# Altium PCB VESC_BMS.PcbDoc (part 1 of 4)
Units mm, origin at the board's own origin, x right, y up, seen from the top; angles counter-clockwise.
Board outline 100 x 75 mm, 4 copper layers (L1, L2, L3, L4), stack 1.446 mm thick; 263 components, 195 nets, 808 pads, 1031 vias.
Unrouted connection lines stored in the file: 1.
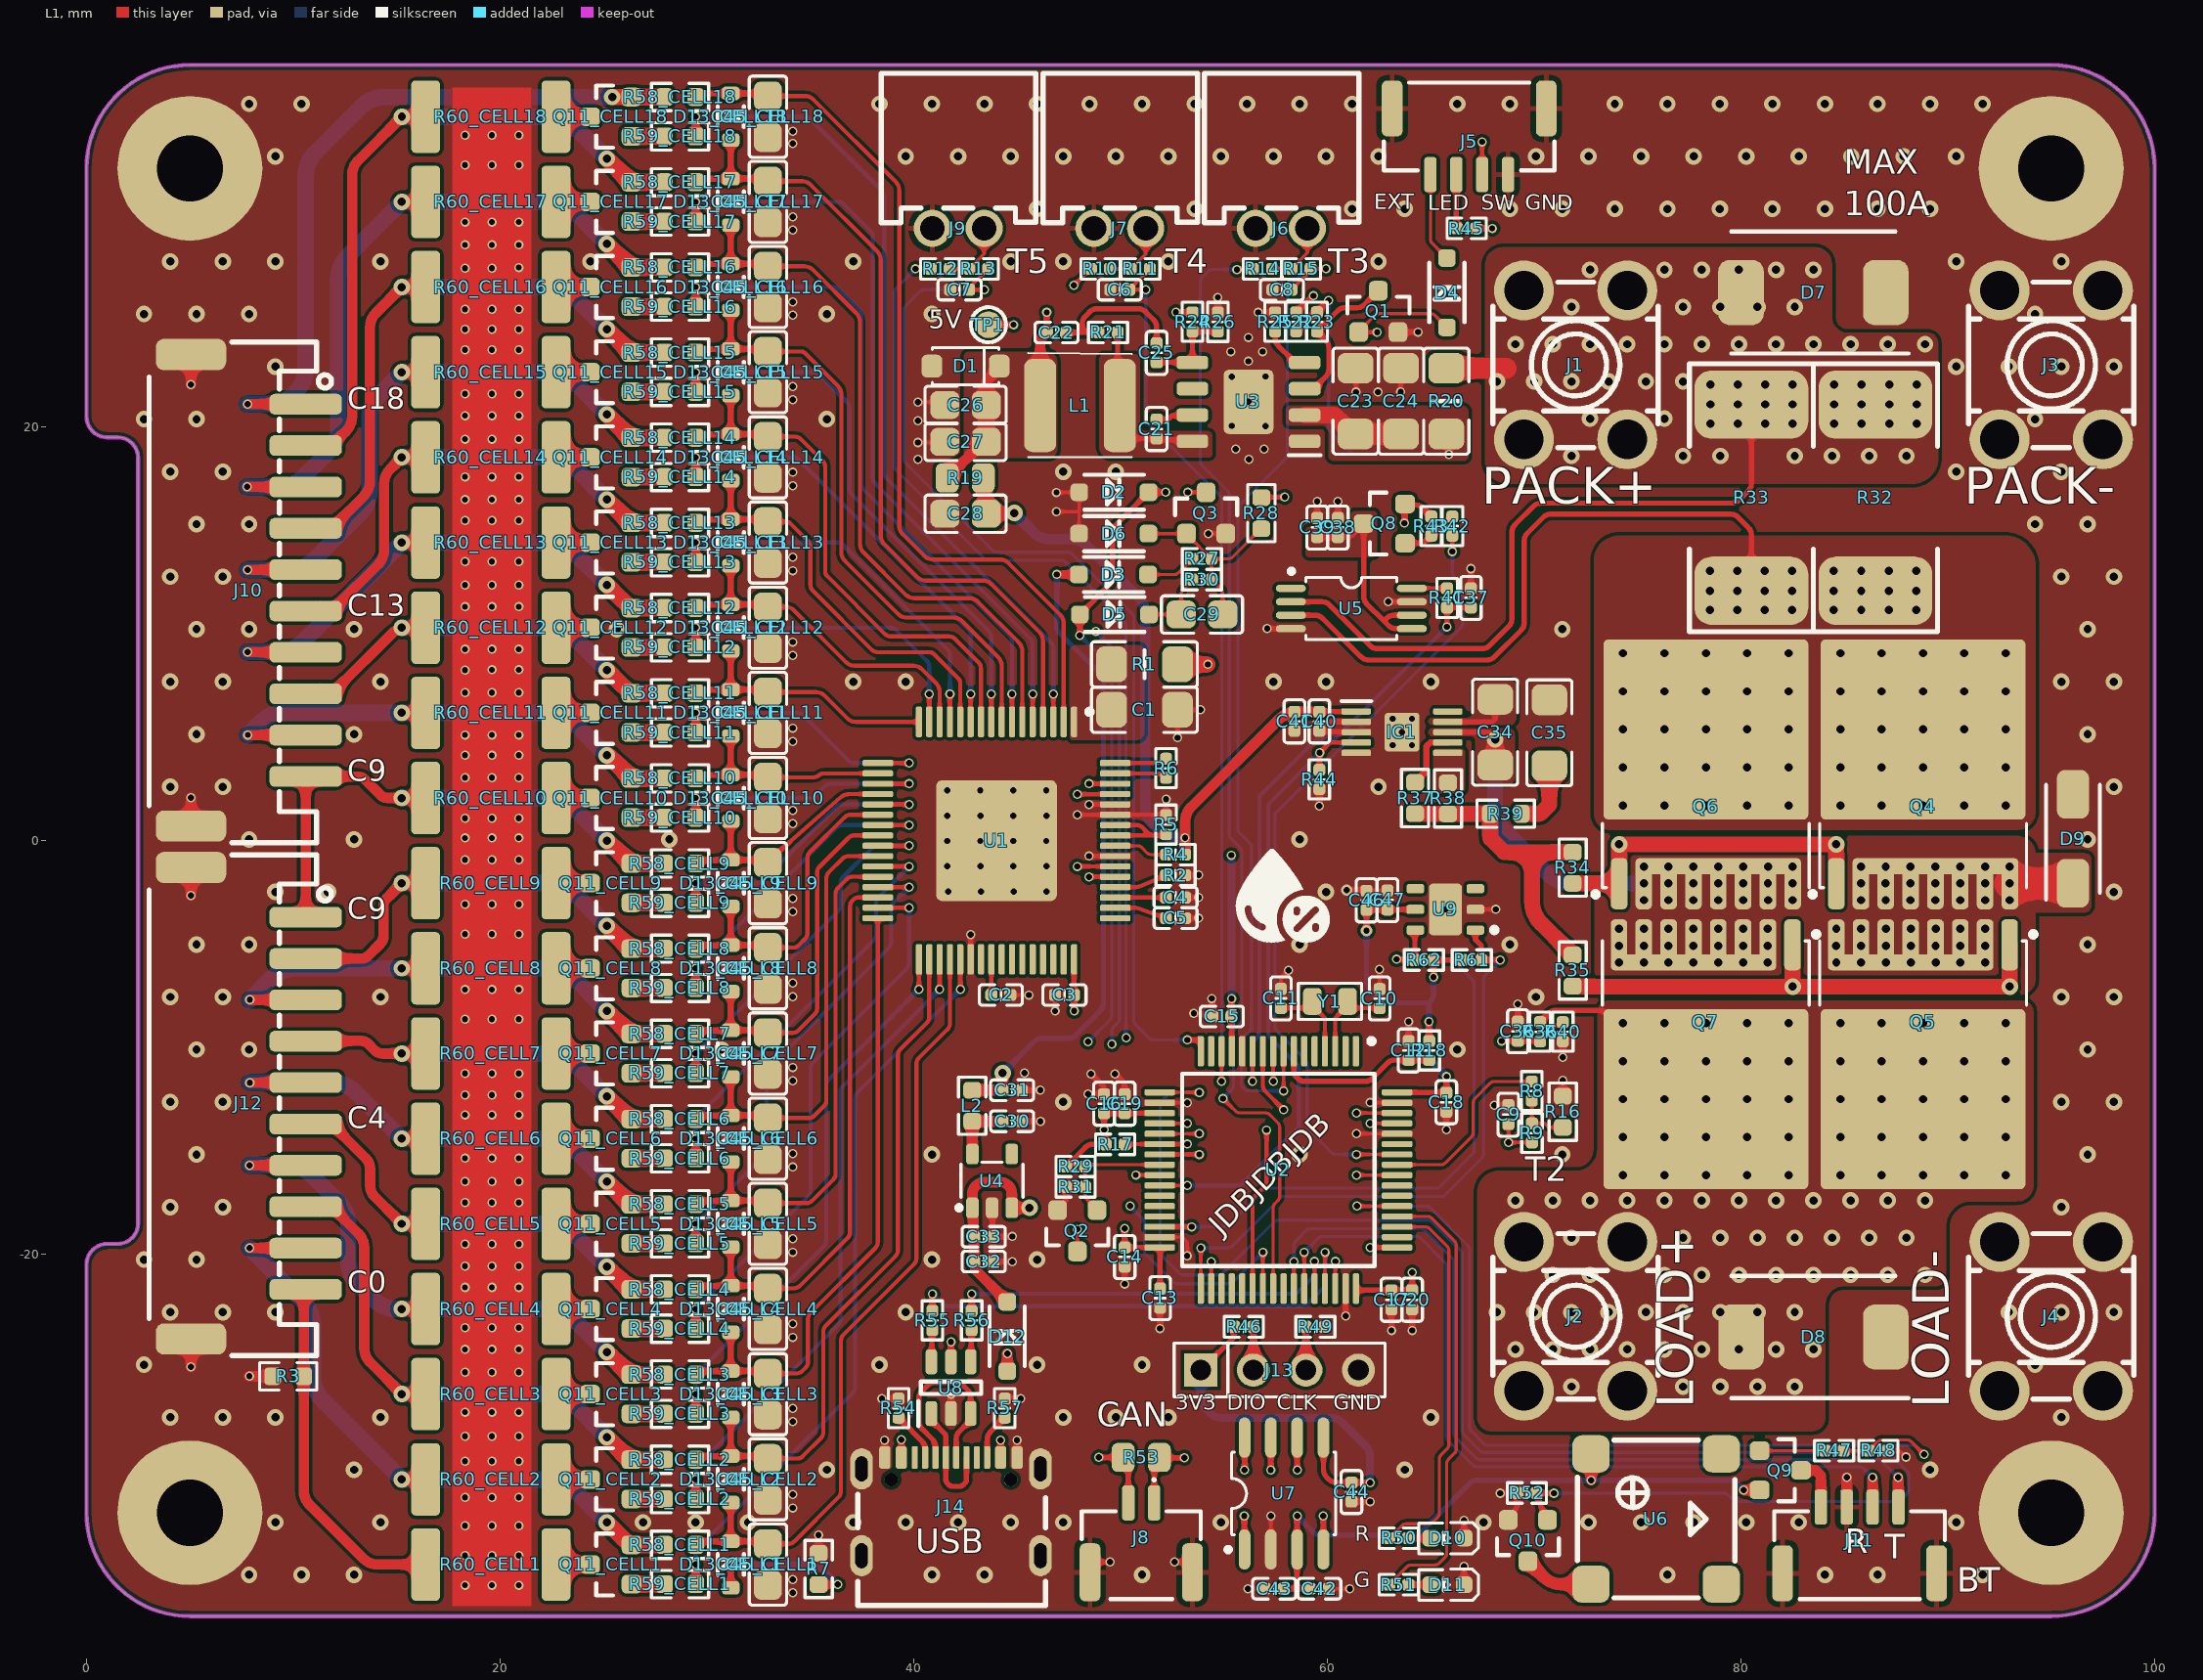
[diagram p0: L1 view]
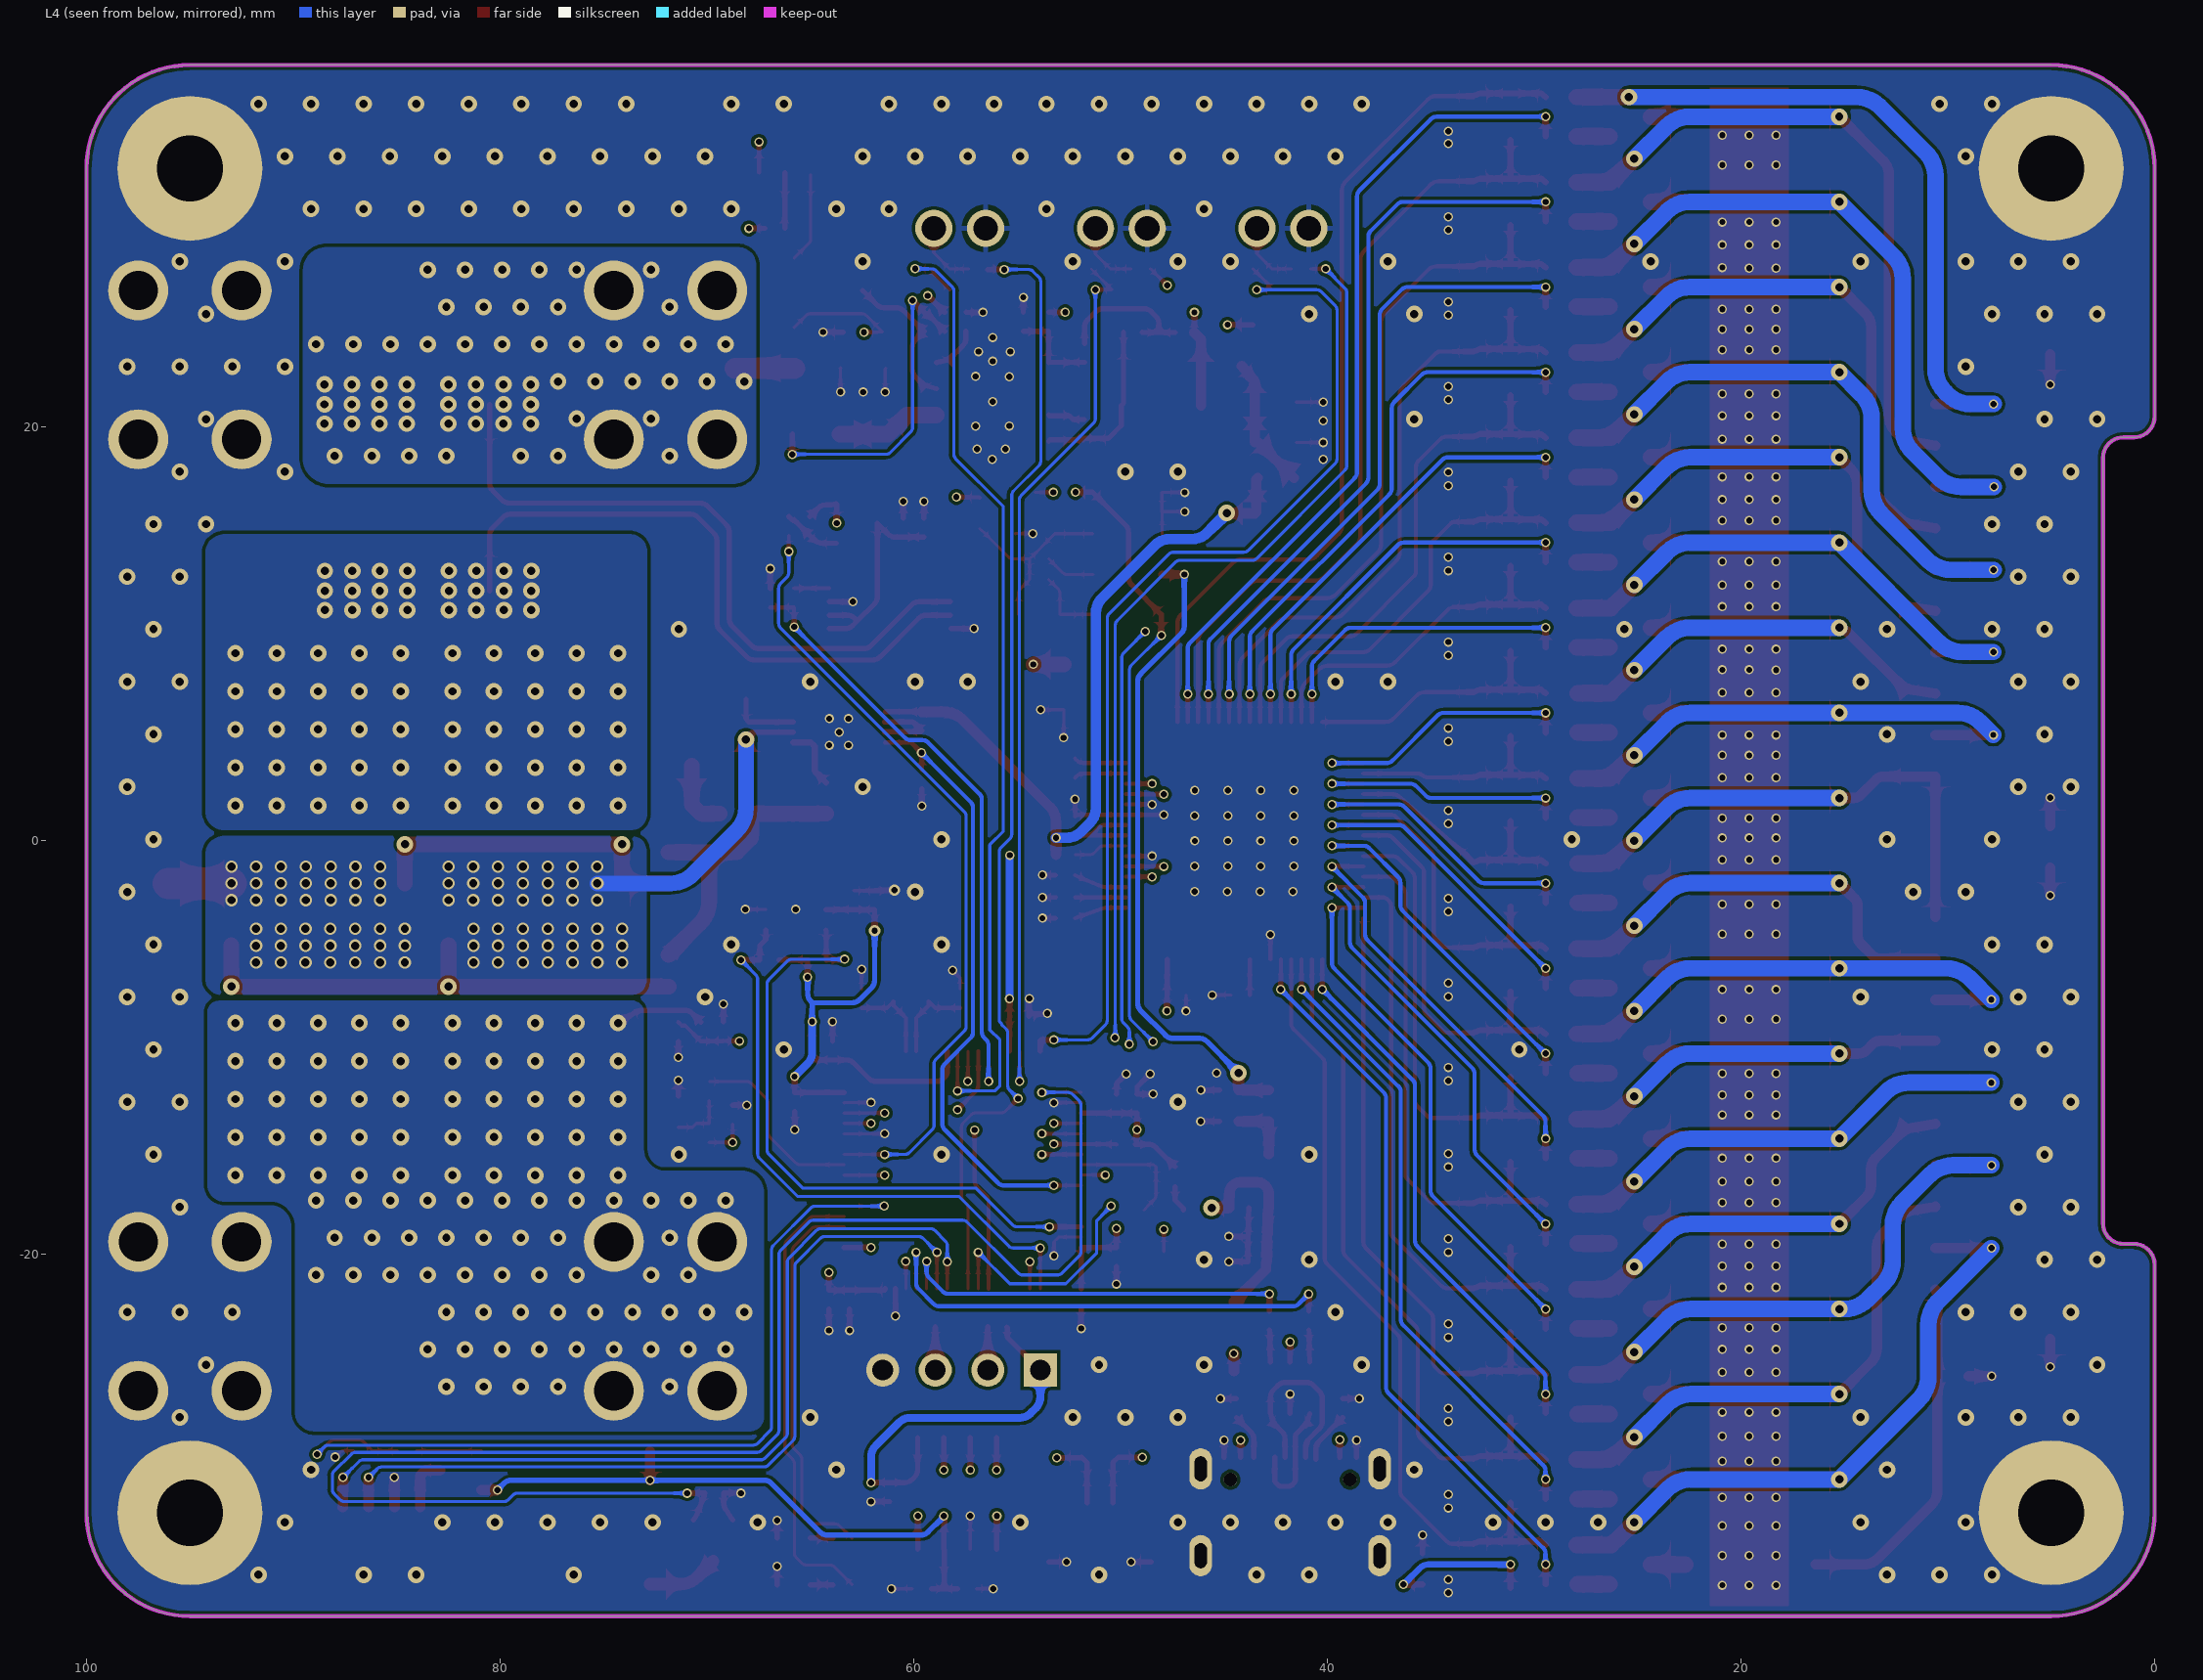
[diagram p1: L4 view, seen from below]
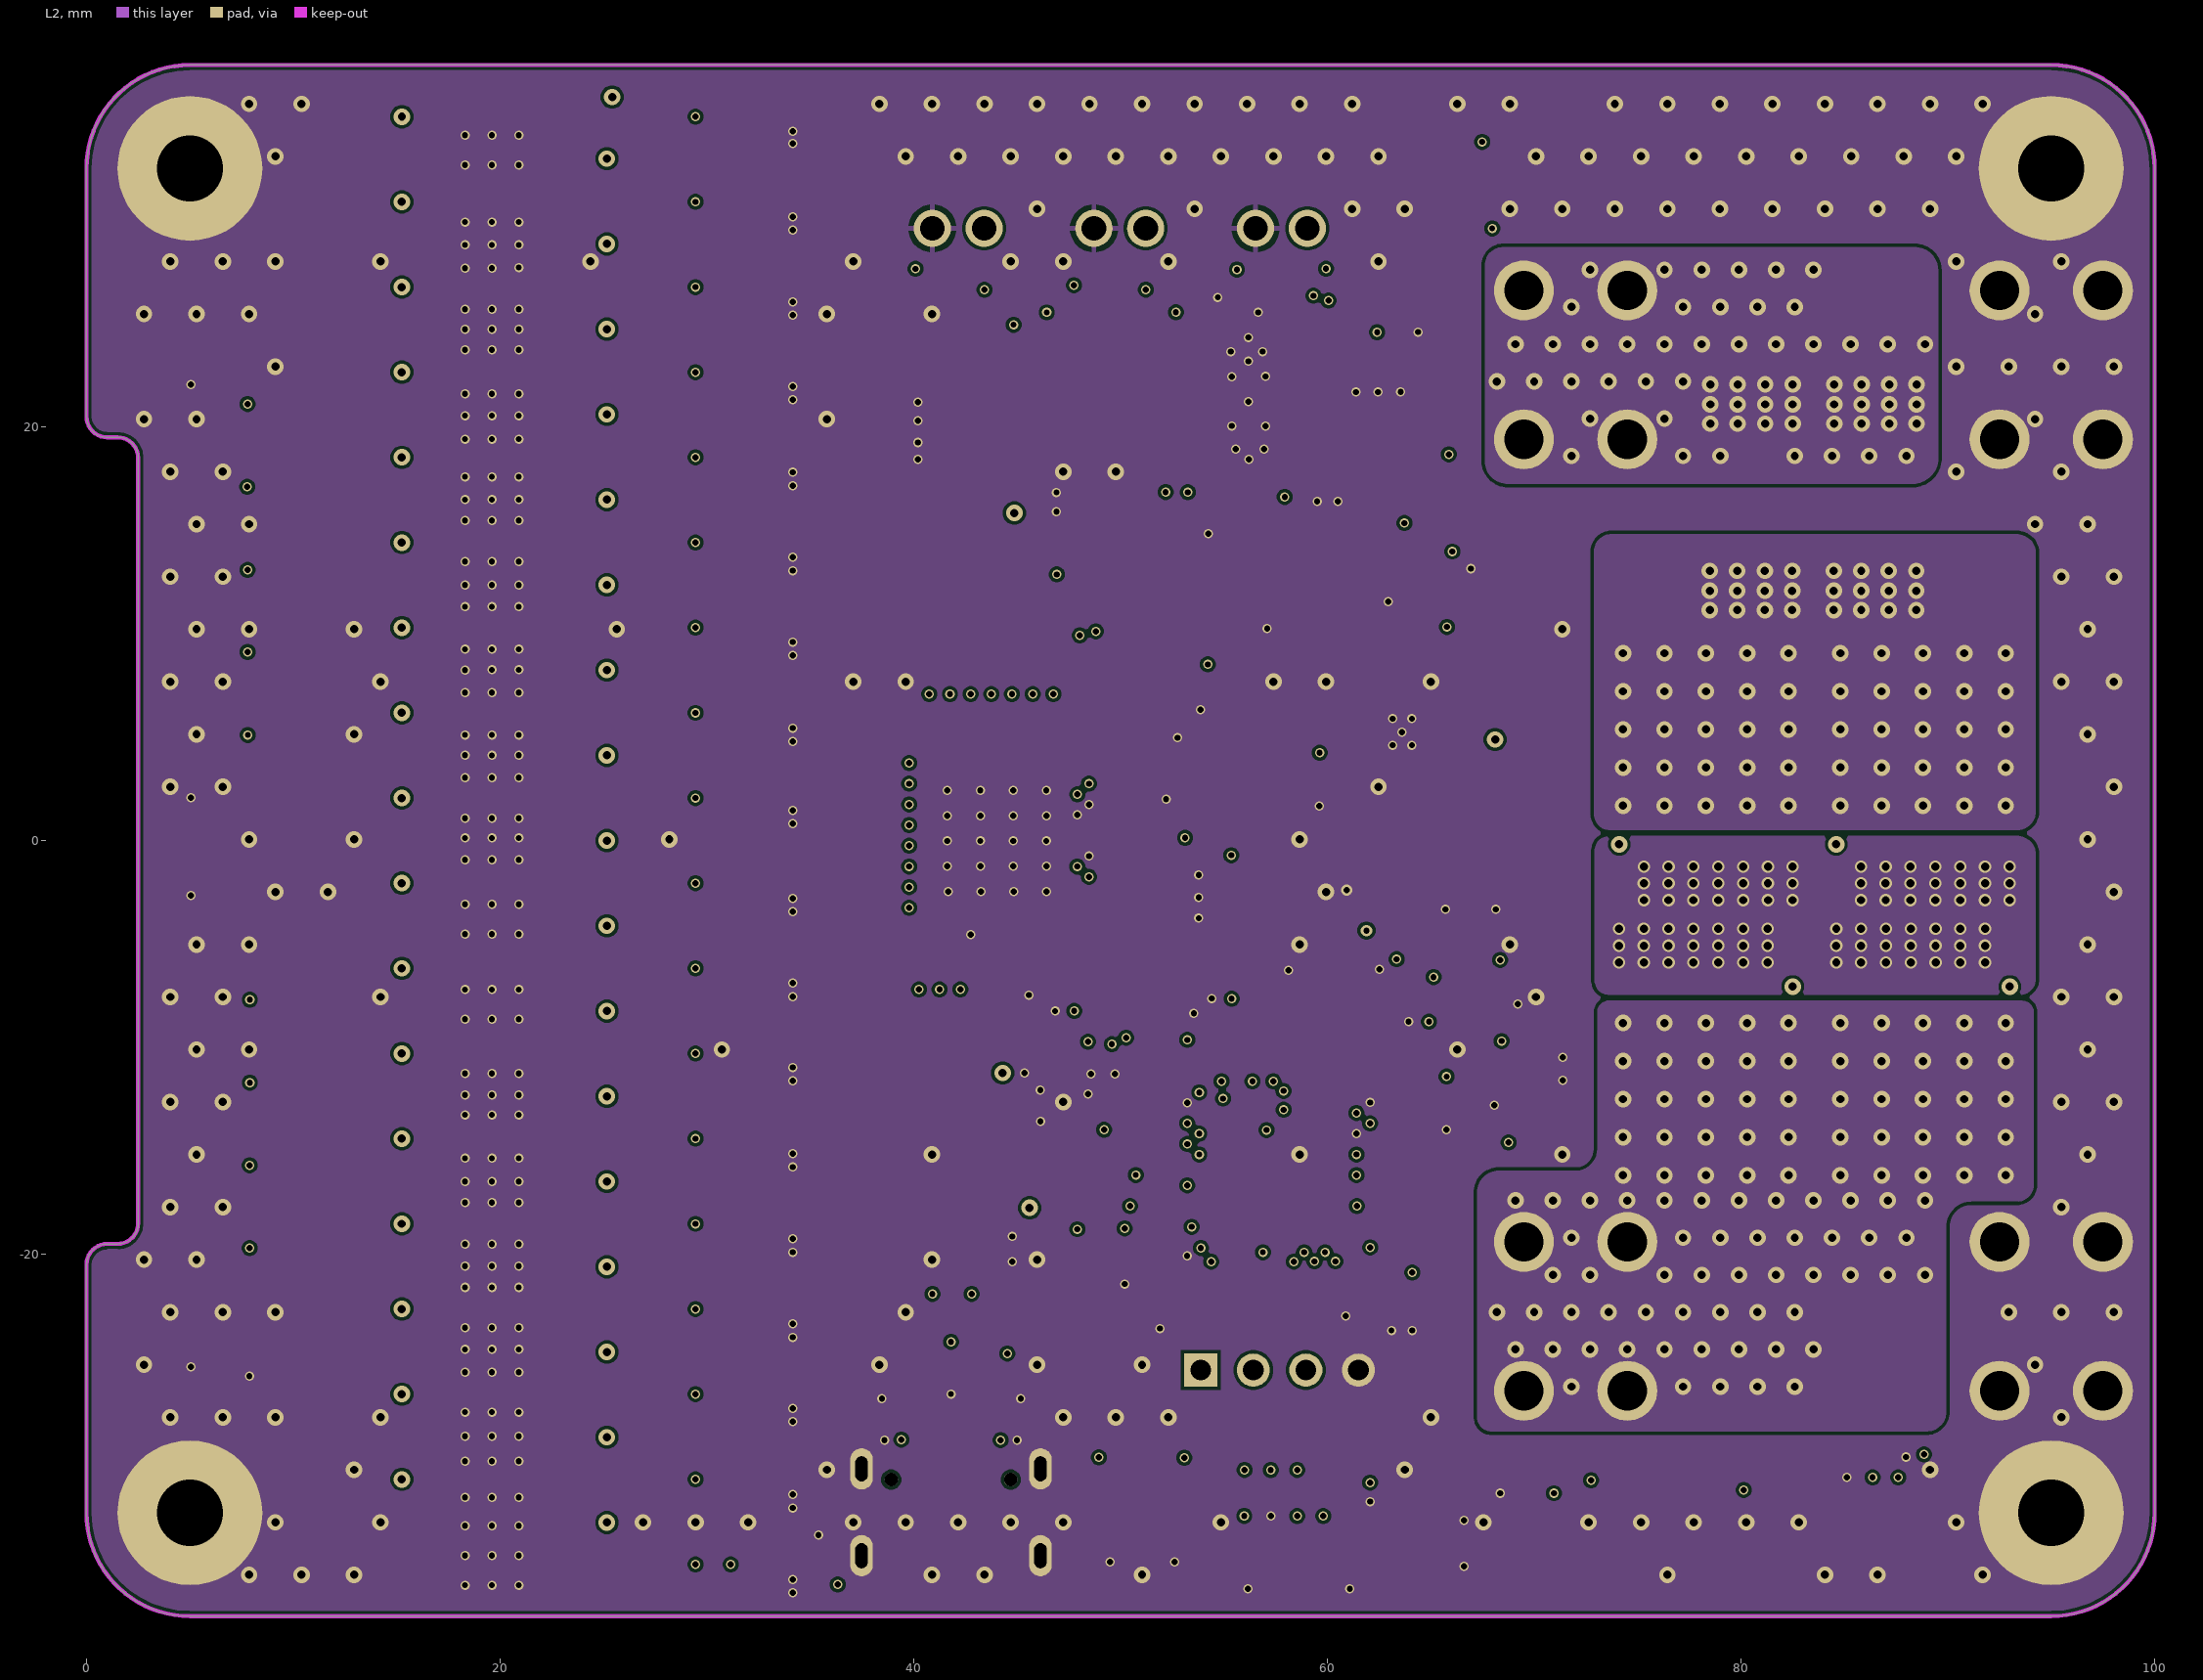
[diagram p2: L2]
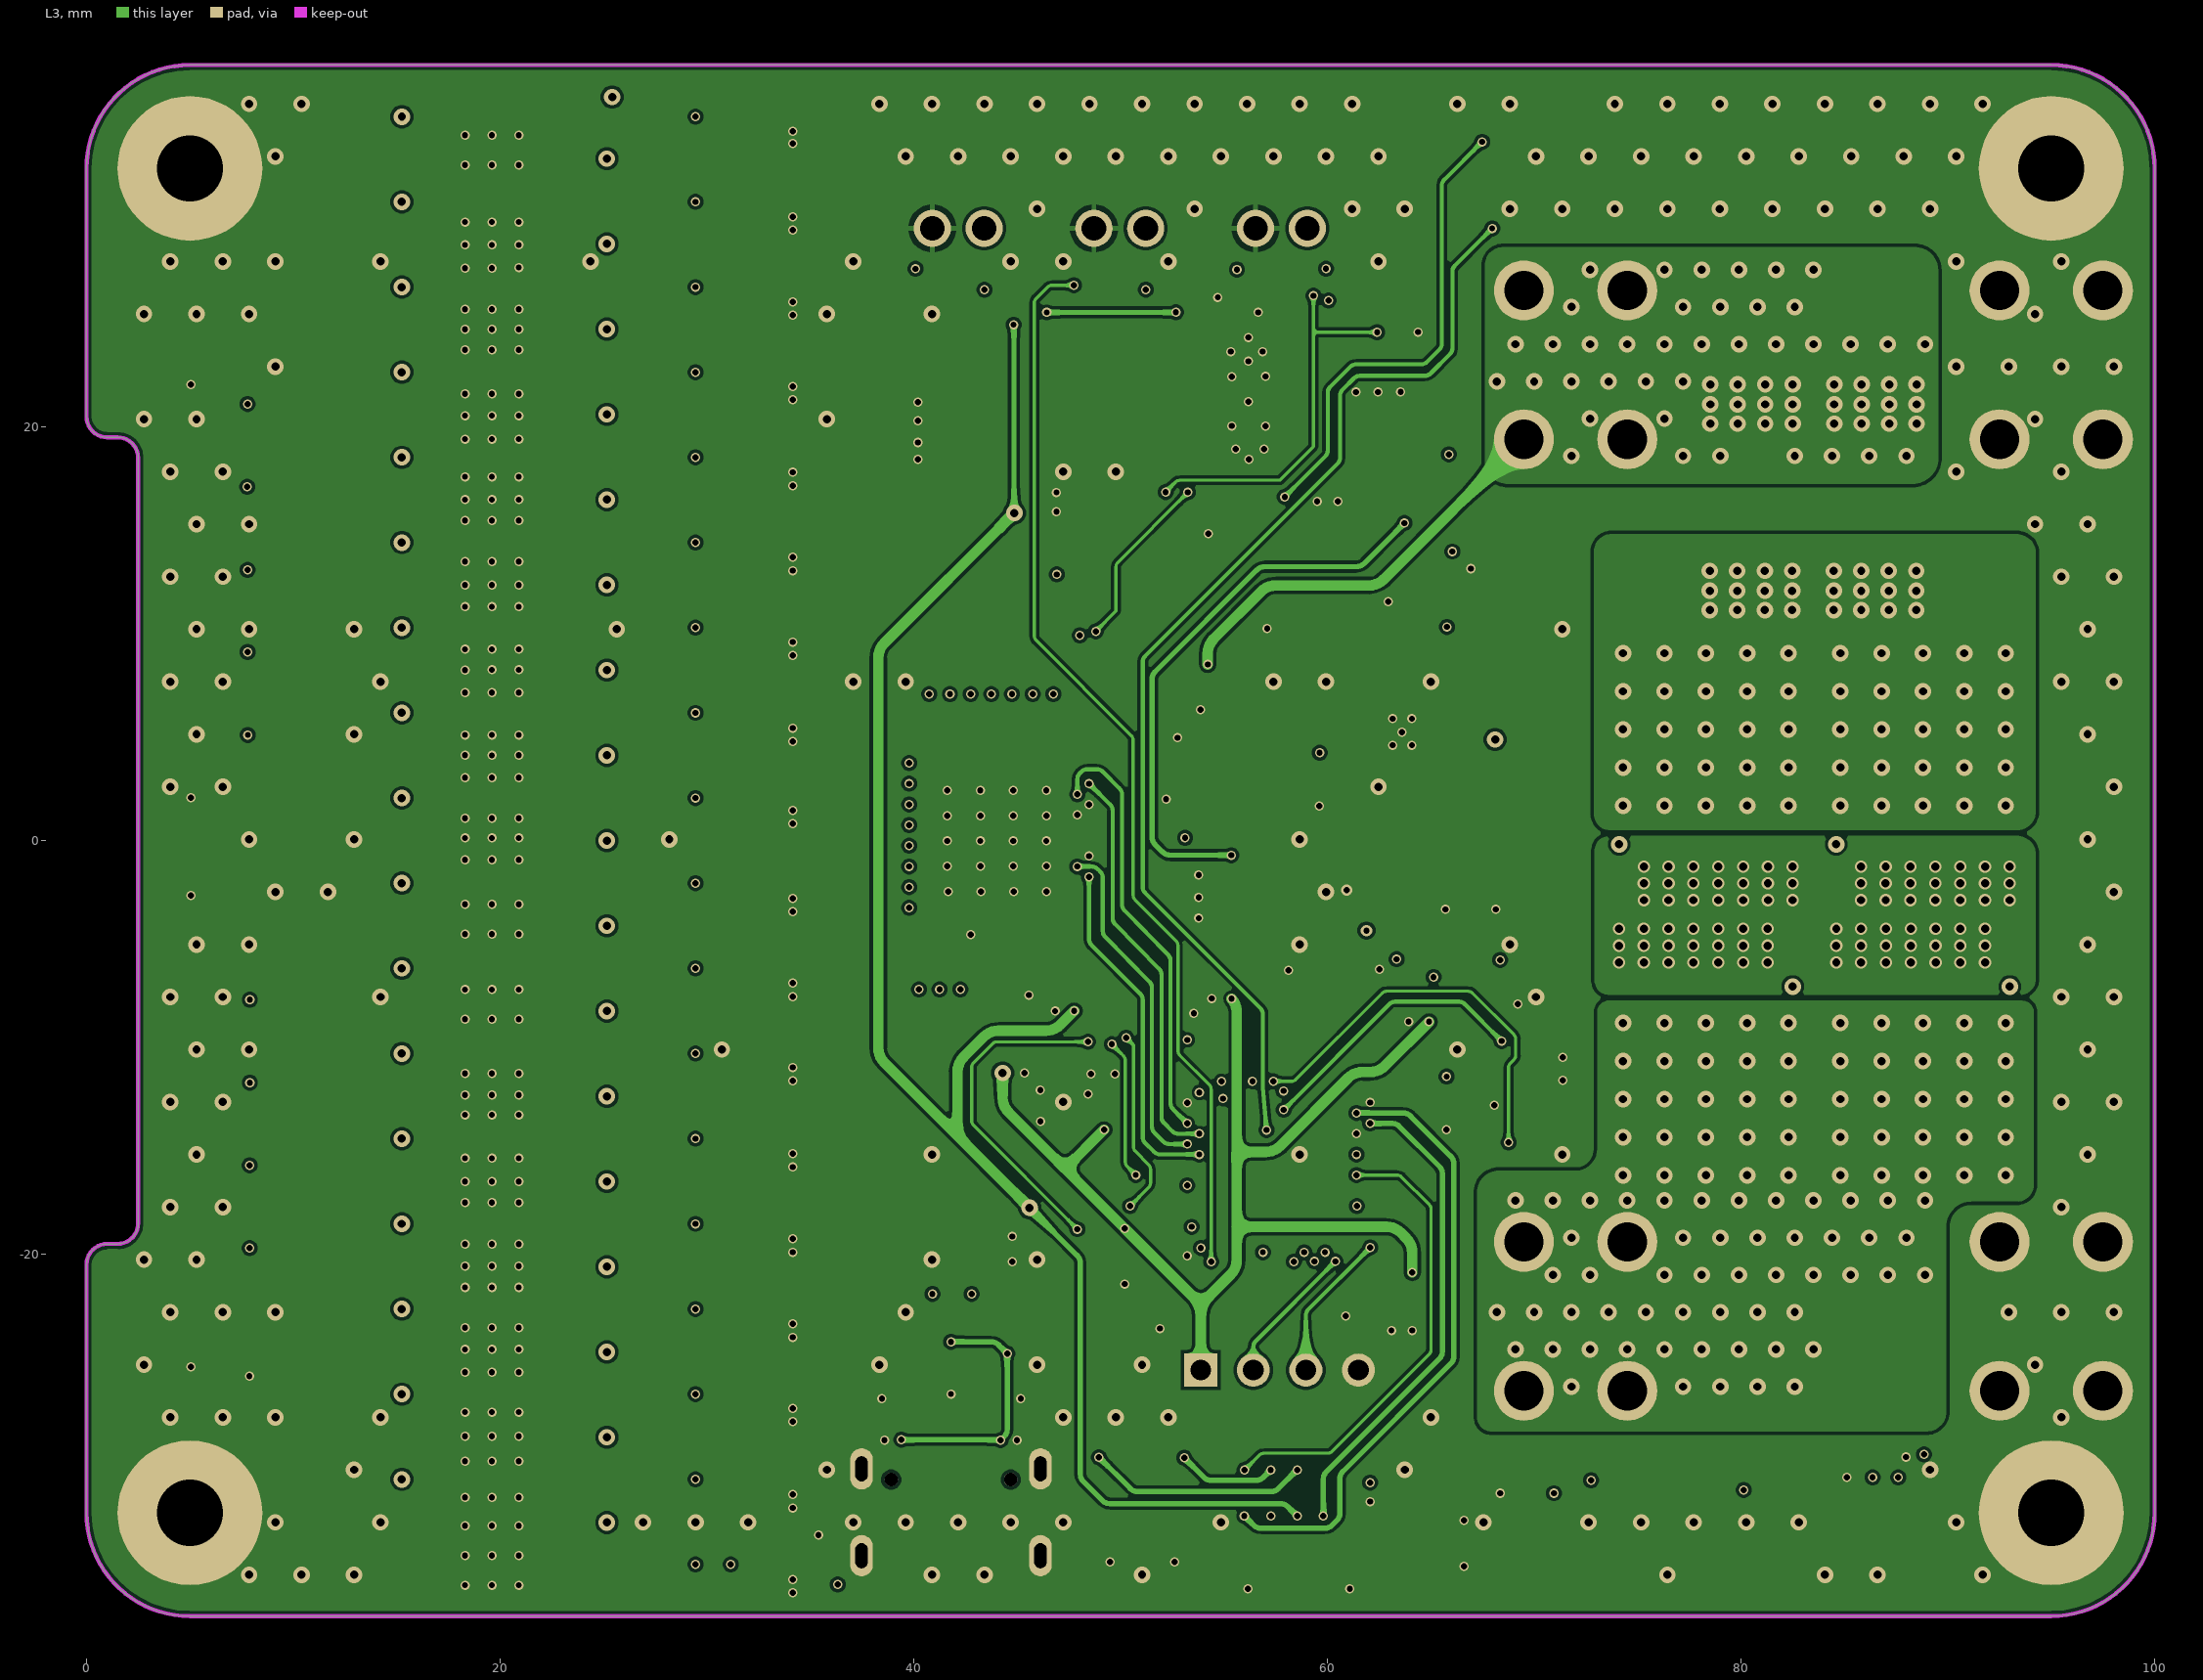
[diagram p3: L3]
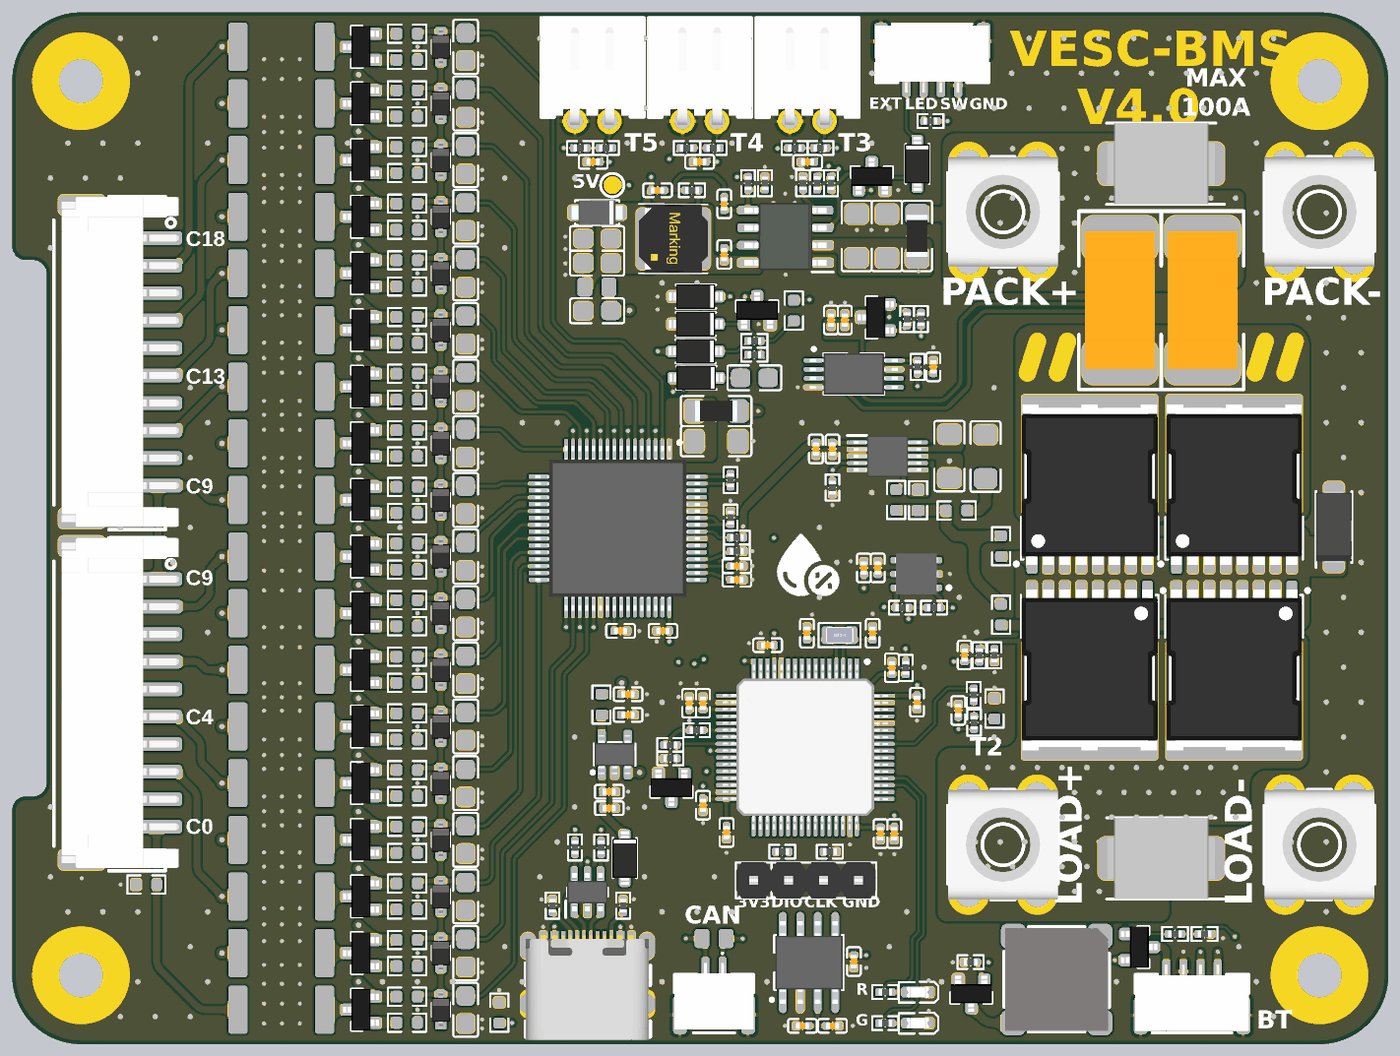
[diagram p6: 3D render of the assembled board from above, using the file's embedded part models]

## Layer stack, top to bottom
Top Solder: solder mask 0.05, Solder Resist, Dk 3.5
L1: signal copper 0.035
Dielectric 1: prepreg 0.288, FR-4, Dk 4.2
L2: signal copper 0.035
Dielectric 3: core 0.73, Dk 4.2
L3: signal copper 0.035
Dielectric 2: prepreg 0.288, Dk 4.2
L4: signal copper 0.035
Bottom Solder: solder mask 0.05, Solder Resist, Dk 3.5

## Board outline
0,-32.5 0,-20.5 cw(c1,-20.5) 1,-19.5 1.5,-19.5 ccw(c1.5,-18.5) 2.5,-18.5 2.5,18.5 ccw(c1.5,18.5) 1.5,19.5 1,19.5 cw(c1,20.5) 0,20.5 0,32.5 cw(c5,32.5) 5,37.5 95,37.5 cw(c95,32.5) 100,32.5 100,-32.5 cw(c95,-32.5) 95,-37.5 5,-37.5 cw(c5,-32.5)

## Design rules (kind name [scope] priority, off if disabled: settings)
Clearance [All] p1: gap=0.152 ignorepadtopadclearanceinfootprint=FALSE
ComponentClearance [All] p1 off: gap=0.254 collisioncheckmode=3 verticalgap=0.254 showdistances=FALSE
HoleSize [All] p1: absolutevalues=TRUE maxlimit=10 minlimit=0.2 maxpercent=80.000 minpercent=20.000
HoleToHoleClearance [All] p1: gap=0.3 allowstackedmicrovias=TRUE
MinimumSolderMaskSliver [All] p1 off: minsoldermaskwidth=0.254
PolygonConnect PolygonConnect_IC [HasFootprint('SSOP44') OR HasFootprint('LQFP48') OR HasFootprint('SO-8') OR HasFootprint('MSOP10') OR HasFootprint('TSSOP16') OR HasFootprint('PDSO8') OR HasFootprint('QFN24') OR HasFootprint('USB3075 - NOSLOT') OR HasFootprint('FSOP4')] p1: connectstyle=Relief reliefconductorwidth=0.254 reliefentries=4 polygonreliefangle="90 Angle" airgapwidth=0.2
PolygonConnect [All] p2: connectstyle=Direct reliefconductorwidth=0.254 reliefentries=4 polygonreliefangle="90 Angle" airgapwidth=0.254
RoutingVias [All] p1: holewidth=0.25 width=0.45 viastyle="Through Hole" minholewidth=0.25 minwidth=0.45 maxholewidth=8 maxwidth=10
SilkToSilkClearance [All] p1 off: silktosilkclearance=0.254
SilkToSolderMaskClearance [IsPad] p1 off: minsilkscreentomaskgap=0.127 clearancetoexposedcopper=TRUE
SolderMaskExpansion [All] p1: expansion=0.05 istentingtop=FALSE
SupplyNets "Schematic Supply Nets" [InNet('VBUS')] p1: voltage=0.000
SupplyNets "Schematic Supply Nets_4" [InNet('5V')] p2: voltage=0.000
SupplyNets "Schematic Supply Nets_3" [InNet('GND')] p3: voltage=0.000
SupplyNets "Schematic Supply Nets_1" [InNet('3V3')] p4: voltage=0.000
Width [All] p1: maxlimit=20 minlimit=0.15 preferedwidth=0.152
24 further rules are at their usual default settings.

## Classes and differential pairs
component class "Humidity Sensor": C46 C47 R61 R62 U9
channel class BMS_CellNode: CELL1 CELL2 CELL3 CELL4 CELL5 CELL6 CELL7 CELL8 CELL9 CELL10 CELL11 CELL12 CELL13 CELL14 CELL15 CELL16 CELL17 CELL18
component class CELL18: C45_CELL18 D13_CELL18 Q11_CELL18 R58_CELL18 R59_CELL18 R60_CELL18
component class CELL17: C45_CELL17 D13_CELL17 Q11_CELL17 R58_CELL17 R59_CELL17 R60_CELL17
component class CELL16: C45_CELL16 D13_CELL16 Q11_CELL16 R58_CELL16 R59_CELL16 R60_CELL16
component class CELL15: C45_CELL15 D13_CELL15 Q11_CELL15 R58_CELL15 R59_CELL15 R60_CELL15
component class CELL14: C45_CELL14 D13_CELL14 Q11_CELL14 R58_CELL14 R59_CELL14 R60_CELL14
component class CELL13: C45_CELL13 D13_CELL13 Q11_CELL13 R58_CELL13 R59_CELL13 R60_CELL13
net class CELL: BATT+ C1 C2 C3 C4 C5 C6 C7 C8 C9 C10 C11 C12 C13 C14 C15 C16 C17 C18 CN2 CN3 CN4 CN5 CN6 CN7 CN8 CN9 CN10 CN11 CN12 CN13 CN14 CN15 CN16 CN17 CN18 CP18 LoadOut NetC1_2 NetC34_2 NetQ4_G NetQ5_G S1 S2 S3 S4 S5 S6 S7 S8 S9 S10 S11 S12 S13 S14 S15 S16 S17 S18 VBATTSENSED
net class S[1..18]: S1 S2 S3 S4 S5 S6 S7 S8 S9 S10 S11 S12 S13 S14 S15 S16 S17 S18
net class CP[1..18]: CN2 CN3 CN4 CN5 CN6 CN7 CN8 CN9 CN10 CN11 CN12 CN13 CN14 CN15 CN16 CN17 CN18 CP18
net class C[1..18]: C1 C2 C3 C4 C5 C6 C7 C8 C9 C10 C11 C12 C13 C14 C15 C16 C17 C18
net class CN[1..18]: CN1 CN2 CN3 CN4 CN5 CN6 CN7 CN8 CN9 CN10 CN11 CN12 CN13 CN14 CN15 CN16 CN17 CN18
net class CM[1..18]: C1 C2 C3 C4 C5 C6 C7 C8 C9 C10 C11 C12 C13 C14 C15 C16 C17 CM1
component class CELL12: C45_CELL12 D13_CELL12 Q11_CELL12 R58_CELL12 R59_CELL12 R60_CELL12
component class CELL11: C45_CELL11 D13_CELL11 Q11_CELL11 R58_CELL11 R59_CELL11 R60_CELL11
component class CELL10: C45_CELL10 D13_CELL10 Q11_CELL10 R58_CELL10 R59_CELL10 R60_CELL10
component class CELL9: C45_CELL9 D13_CELL9 Q11_CELL9 R58_CELL9 R59_CELL9 R60_CELL9
component class CELL8: C45_CELL8 D13_CELL8 Q11_CELL8 R58_CELL8 R59_CELL8 R60_CELL8
component class CELL7: C45_CELL7 D13_CELL7 Q11_CELL7 R58_CELL7 R59_CELL7 R60_CELL7
component class CELL6: C45_CELL6 D13_CELL6 Q11_CELL6 R58_CELL6 R59_CELL6 R60_CELL6
component class CELL5: C45_CELL5 D13_CELL5 Q11_CELL5 R58_CELL5 R59_CELL5 R60_CELL5
component class CELL4: C45_CELL4 D13_CELL4 Q11_CELL4 R58_CELL4 R59_CELL4 R60_CELL4
component class CELL3: C45_CELL3 D13_CELL3 Q11_CELL3 R58_CELL3 R59_CELL3 R60_CELL3
component class CELL2: C45_CELL2 D13_CELL2 Q11_CELL2 R58_CELL2 R59_CELL2 R60_CELL2
component class CELL1: C45_CELL1 D13_CELL1 Q11_CELL1 R58_CELL1 R59_CELL1 R60_CELL1
component class "Battery stack monitor": C1 C2 C3 C4 C5 C6 C7 C8 C9 R1 R2 R3 R4 R5 R6 R7 R8 R9 R10 R11 R12 R13 R14 R15 R16 U1
component class "USB - Serial": D12 J14 R54 R55 R56 R57 U8
component class PowerSwitch: C34 C35 C36 C37 C38 C39 C40 C41 D7 D8 D9 IC1 Q4 Q5 Q6 Q7 Q8 R32 R33 R34 R35 R36 R37 R38 R39 R40 R41 R42 R43 R44 U5
component class "Power management": C21 C22 C23 C24 C25 C26 C27 C28 C29 C30 C31 C32 C33 D1 D2 D3 D4 D5 D6 L1 L2 Q1 Q2 Q3 R19 R20 R21 R22 R23 R24 R25 R26 R27 R28 R29 R30 R31 U3 U4
component class BMS_TopLevel: D10 D11 J1 J2 J3 J4 J5 J6 J7 J8 J9 J10 J11 J12 J13 Q9 Q10 R45 R46 R47 R48 R49 R50 R51 R52 TP1 U6
component class Controller: C10 C11 C12 C13 C14 C15 C16 C17 C18 C19 C20 R17 R18 U2 Y1
component class CAN: C42 C43 C44 R53 U7

## Components (designator, comment, footprint, x,y, rotation, side; value= is the part's Value field where it differs from the comment)
C1 "1uF" C-1206 51.156,6.326 r180 top
C2 "100nF" C0402 44.21,-7.465 r0 top
C3 "2.2uF" C0402 47.29,-7.464 r180 top
C4 "1uF" C0402 52.66,-2.75 r0 top
C5 "1uF" C0402 52.66,-3.75 r0 top
C6 "1200pF" C0402 49.962,26.637 r180 top
C7 "1200pF" C0402 42.216,26.637 r180 top
C8 "1200pF" C0402 57.803,26.632 r180 top
C9 "1200pF" C0402 68.753,-13.25 r90 top
C10 "12pF" C0402 62.525,-7.635 r270 top
C11 "12pF" C0402 57.753,-7.63 r270 top
C12 "100nF" C0402 63.927,-10.15 r270 top
C13 "100nF" C0402 51.91,-22.121 r90 top
C14 "100nF" C0402 50.2,-20.133 r90 top
C15 "100nF" C0402 54.9,-8.5 r0 top
C16 "4.7uF" C0402 49.2,-12.719 r270 top
C17 "100nF" C0402 63.1,-22.2 r90 top
C18 "4.7uF" C0402 65.752,-12.65 r90 top
C19 "100nF" C0402 50.2,-12.719 r270 top
C20 "1uF" C0402 64.1,-22.2 r90 top
C21 "2.2nF" C0402 51.743,19.902 r270 top
C22 "3.3nF" C0402 46.902,24.565 r180 top
C23 "2.2uF" C-1206 61.363,21.248 r270 top
C24 "1uF" C-1206 63.563,21.248 r270 top
C25 "56pF" C0402 51.743,23.583 r270 top
C26 "22uF" C-0805 42.506,21.063 r0 top
C27 "10uF" C-0805 42.506,19.277 r0 top
C28 "10uF" C-0805 42.506,15.806 r0 top
C29 "2.2uF" C-0805 53.936,10.934 r180 top
C30 "2.2uF" C0402 44.757,-13.571 r0 top
C31 "100nF" C0402 44.757,-12.067 r0 top
C32 "2.2uF" C0402 43.386,-20.354 r0 top
C33 "100nF" C0402 43.386,-19.154 r0 top
C34 "100nF" C-1206 68.111,5.243 r270 top
C35 "100nF" C-1206 70.735,5.212 r270 top
C36 "100nF" C0402 69.206,-9.219 r270 top
C37 "10nF" C0402 66.94,11.732 r270 top
C38 "100nF" C0402 60.506,15.136 r270 top
C39 "1uF" C0402 59.506,15.136 r270 top
C40 "100nF" C0402 59.611,5.767 r270 top
C41 "1uF" C0402 58.407,5.767 r90 top
C42 "100nF" C0402 59.612,-36.172 r180 top
C43 "1uF" C0402 57.43,-36.172 r0 top
C44 "1uF" C0402 61.166,-31.497 r90 top
C45_CELL1 "100nF" C-0805 32.95,-35 r90 top (schematic designator C45)
C45_CELL2 "100nF" C-0805 32.95,-30.882 r90 top (schematic designator C45)
C45_CELL3 "100nF" C-0805 32.95,-26.765 r90 top (schematic designator C45)
C45_CELL4 "100nF" C-0805 32.95,-22.647 r90 top (schematic designator C45)
C45_CELL5 "100nF" C-0805 32.95,-18.529 r90 top (schematic designator C45)
C45_CELL6 "100nF" C-0805 32.95,-14.412 r90 top (schematic designator C45)
C45_CELL7 "100nF" C-0805 32.95,-10.294 r90 top (schematic designator C45)
C45_CELL8 "100nF" C-0805 32.95,-6.176 r90 top (schematic designator C45)
C45_CELL9 "100nF" C-0805 32.95,-2.059 r90 top (schematic designator C45)
C45_CELL10 "100nF" C-0805 32.95,2.059 r90 top (schematic designator C45)
C45_CELL11 "100nF" C-0805 32.95,6.176 r90 top (schematic designator C45)
C45_CELL12 "100nF" C-0805 32.95,10.294 r90 top (schematic designator C45)
C45_CELL13 "100nF" C-0805 32.95,14.412 r90 top (schematic designator C45)
C45_CELL14 "100nF" C-0805 32.95,18.529 r90 top (schematic designator C45)
C45_CELL15 "100nF" C-0805 32.95,22.647 r90 top (schematic designator C45)
C45_CELL16 "100nF" C-0805 32.95,26.765 r90 top (schematic designator C45)
C45_CELL17 "100nF" C-0805 32.95,30.882 r90 top (schematic designator C45)
C45_CELL18 "100nF" C-0805 32.95,35 r90 top (schematic designator C45)
C46 "100nF" C0402 61.891,-2.887 r270 top
C47 "100nF" C0402 62.904,-2.878 r270 top
D1 "SMAJ5.0A" SOD-123F 42.506,22.943 r180 top
D2 "BZT52C16" SOD123 49.676,16.843 r0 top
D3 "1N4148W" SOD123 49.656,12.866 r0 top
D4 "1N4148W" SOD123 65.78,26.49 r90 top
D5 "1N4148W" SOD123 49.706,10.934 r0 top
D6 "BZT52C16" SOD123 49.669,14.843 r0 top
D7 "SMA75A" DIOM7959X262N 83.5,26.5 r180 top
D8 "SMA75A" DIOM7959X262N 83.5,-24 r180 top
D9 "ES2BA-13-F" DIOM5226X230N 96.05,0.086 r90 top
D10 "Green" LED0603 65.812,-33.725 r180 top
D11 "Green" LED0603 65.811,-35.978 r180 top
D12 "1N4148W" SOD123 44.52,-23.981 r90 top
D13_CELL1 "PDZ7.5B" SOD-323 31.15,-35 r90 top (schematic designator D13)
D13_CELL2 "PDZ7.5B" SOD-323 31.15,-30.882 r90 top (schematic designator D13)
D13_CELL3 "PDZ7.5B" SOD-323 31.15,-26.765 r90 top (schematic designator D13)
D13_CELL4 "PDZ7.5B" SOD-323 31.15,-22.647 r90 top (schematic designator D13)
D13_CELL5 "PDZ7.5B" SOD-323 31.15,-18.529 r90 top (schematic designator D13)
D13_CELL6 "PDZ7.5B" SOD-323 31.15,-14.412 r90 top (schematic designator D13)
D13_CELL7 "PDZ7.5B" SOD-323 31.15,-10.294 r90 top (schematic designator D13)
D13_CELL8 "PDZ7.5B" SOD-323 31.15,-6.176 r90 top (schematic designator D13)
D13_CELL9 "PDZ7.5B" SOD-323 31.15,-2.059 r90 top (schematic designator D13)
D13_CELL10 "PDZ7.5B" SOD-323 31.15,2.059 r90 top (schematic designator D13)
D13_CELL11 "PDZ7.5B" SOD-323 31.15,6.176 r90 top (schematic designator D13)
D13_CELL12 "PDZ7.5B" SOD-323 31.15,10.294 r90 top (schematic designator D13)
D13_CELL13 "PDZ7.5B" SOD-323 31.15,14.412 r90 top (schematic designator D13)
D13_CELL14 "PDZ7.5B" SOD-323 31.15,18.529 r90 top (schematic designator D13)
D13_CELL15 "PDZ7.5B" SOD-323 31.15,22.647 r90 top (schematic designator D13)
D13_CELL16 "PDZ7.5B" SOD-323 31.15,26.765 r90 top (schematic designator D13)
D13_CELL17 "PDZ7.5B" SOD-323 31.15,30.882 r90 top (schematic designator D13)
D13_CELL18 "PDZ7.5B" SOD-323 31.15,35 r90 top (schematic designator D13)
IC1 "LTC7001EMSE#PBF" SOP50P490X110-11N 63.611,5.243 r0 top
J1 "M5 Bush" CONN-TH_T44001 72,23 r0 top
J2 "M5 Bush" CONN-TH_T44001 72,-23 r0 top
J3 "M5 Bush" CONN-TH_T44001 95,23 r0 top
J4 "M5 Bush" CONN-TH_T44001 95,-23 r0 top
J5 "1.25-4PWTDK" SM04B-GHS-TB 66.858,32.4 r180 top
J6 "WAFER-XH254Z-2A" CONN-TH_2P-P2.50_XH-2AW 57.777,29.6 r0 top
J7 "WAFER-XH254Z-2A" CONN-TH_2P-P2.50_XH-2AW 49.964,29.6 r0 top
J8 "1.25-2PWTDK" BM02B-GHS-TBT_1 51,-33.7 r0 top
J9 "WAFER-XH254Z-2A" CONN-TH_2P-P2.50_XH-2AW 42.151,29.6 r0 top
J10 "S10B-PH-SM4-TB_LF__SN_" S10B-PH-SM4-TB 7.827,12.102 r90 top
J11 "1.25-4PWTDK" SM04B-GHS-TB 85.736,-32.425 r0 top
J12 "S10B-PH-SM4-TB_LF__SN_" S10B-PH-SM4-TB 7.827,-12.698 r90 top
J13 "4 HEADER" PZ-4P-2_54 57.69,-25.6 r0 top
J14 "TYPE-C 16PIN 2MD(073)" USB-C-SMD_TYPE-C-6PIN-2MD-073 41.8,-32.2 r0 top
L1 "47uH 1A" L5040 48.039,21.035 r180 top
L2 "PZ1608D102" L0603 42.825,-12.819 r90 top
Q1 "BSS123" SOT-23 62.465,25.588 r0 top
Q2 "BSS123" SOT-23 47.909,-18.864 r180 top
Q3 "BSS123" SOT-23 54.136,15.843 r0 top
Q4 "NCEP023N10LL" TOLL 88.8,3.373 r90 top
Q5 "NCEP023N10LL" TOLL 88.8,-10.5 r270 top
Q6 "NCEP023N10LL" TOLL 78.3,3.373 r90 top
Q7 "NCEP023N10LL" TOLL 78.3,-10.5 r270 top
Q8 "TSM2323" SOT-23 62.754,15.33 r90 top
Q9 "TSM2323" SOT-23 81.903,-30.446 r270 top
Q10 "BSS123" SOT-23 69.698,-33.842 r180 top
Q11_CELL1 "TSM2323" SOT-23 25.35,-35 r90 top (schematic designator Q11)
Q11_CELL2 "TSM2323" SOT-23 25.35,-30.882 r90 top (schematic designator Q11)
Q11_CELL3 "TSM2323" SOT-23 25.35,-26.765 r90 top (schematic designator Q11)
Q11_CELL4 "TSM2323" SOT-23 25.35,-22.647 r90 top (schematic designator Q11)
Q11_CELL5 "TSM2323" SOT-23 25.35,-18.529 r90 top (schematic designator Q11)
Q11_CELL6 "TSM2323" SOT-23 25.35,-14.412 r90 top (schematic designator Q11)
Q11_CELL7 "TSM2323" SOT-23 25.35,-10.294 r90 top (schematic designator Q11)
Q11_CELL8 "TSM2323" SOT-23 25.35,-6.176 r90 top (schematic designator Q11)
Q11_CELL9 "TSM2323" SOT-23 25.35,-2.059 r90 top (schematic designator Q11)
Q11_CELL10 "TSM2323" SOT-23 25.35,2.059 r90 top (schematic designator Q11)
Q11_CELL11 "TSM2323" SOT-23 25.35,6.176 r90 top (schematic designator Q11)
Q11_CELL12 "TSM2323" SOT-23 25.35,10.294 r90 top (schematic designator Q11)
Q11_CELL13 "TSM2323" SOT-23 25.35,14.412 r90 top (schematic designator Q11)
Q11_CELL14 "TSM2323" SOT-23 25.35,18.529 r90 top (schematic designator Q11)
Q11_CELL15 "TSM2323" SOT-23 25.35,22.647 r90 top (schematic designator Q11)
Q11_CELL16 "TSM2323" SOT-23 25.35,26.765 r90 top (schematic designator Q11)
Q11_CELL17 "TSM2323" SOT-23 25.35,30.882 r90 top (schematic designator Q11)
Q11_CELL18 "TSM2323" SOT-23 25.35,35 r90 top (schematic designator Q11)
R1 "10R" R1206 51.156,8.523 r180 top
R2 "100R" 0402 52.66,-1.677 r180 top
R3 "0R" 0603 9.75,-25.9 r0 top
R4 "1M" 0402 52.66,-0.677 r180 top
R5 "20K" 0402 52.2,0.771 r270 top
R6 "100R" 0402 52.2,3.5 r90 top
R7 "0R" 0603 35.4,-35.218 r270 top
R8 "10k" 0402 69.883,-12.11 r90 top
R9 "3.3k" 0402 69.894,-14.133 r270 top
R10 "10k" 0402 49.025,27.645 r180 top
R11 "3.3k" 0402 50.958,27.645 r0 top
R12 "10k" 0402 41.282,27.645 r180 top
R13 "3.3k" 0402 43.142,27.645 r0 top
R14 "10k" 0402 56.872,27.645 r180 top
R15 "3.3k" 0402 58.729,27.645 r0 top
R16 "NTCS0805E4104JMT" 0603 71.383,-13.11 r270 top
R17 "5k" 0402 49.74,-14.686 r180 top
R18 "10k" 0402 64.927,-10.15 r90 top
R19 "1R" 0805 42.489,17.535 r180 top
R20 "10R" R1206 65.755,21.248 r270 top
R21 "453k" 0402 49.4,24.572 r0 top
R22 "4.7M" 0402 58.49,25.082 r270 top
R23 "4.7M" 0402 59.5,25.085 r90 top
R24 "510k" 0402 53.476,25.082 r90 top
R25 "42k" 0402 57.474,25.082 r270 top
R26 "160k" 0402 54.702,25.077 r270 top
R27 "10k" 0402 53.936,13.625 r0 top
R28 "100R" 0603 56.806,15.829 r90 top
R29 "10k" 0402 47.826,-15.76 r180 top
R30 "1M" 0402 53.936,12.62 r0 top
R31 "10k" 0402 47.826,-16.739 r0 top
R32 "1mOhm" RES-SMD_L10.0-W5.2 86.5,16.579 r270 top
R33 "1mOhm" RES-SMD_L10.0-W5.2 80.5,16.579 r270 top
R34 "0R" 0603 71.859,-1.312 r270 top
R35 "10R" 0603 71.859,-6.283 r270 top
R36 "1M" 0402 70.287,-9.239 r90 top
R37 "0R" 0603 64.239,2.059 r270 top
R38 "4.7R" 0603 65.83,2.041 r270 top
R39 "10R" 0603 68.625,1.298 r180 top
R40 "53K" 0402 71.383,-9.239 r270 top
R41 "100R" 0402 65.786,11.732 r270 top
R42 "1.5k" 0402 66.044,15.205 r270 top
R43 "10k" 0402 65.026,15.205 r90 top
R44 "10k" 0402 59.611,2.957 r270 top
R45 "470" 0402 66.73,29.601 r180 top
R46 "1.5k" 0402 55.96,-23.509 r0 top
R47 "1.5k" 0402 84.505,-29.496 r180 top
R48 "10k" 0402 86.643,-29.496 r180 top
R49 "1.5k" 0402 59.42,-23.509 r0 top
R50 "470" 0402 63.451,-33.725 r180 top
R51 "470" 0402 63.451,-35.978 r180 top
R52 "1.5k" 0402 69.648,-31.542 r180 top
R53 "120R" 0805 51,-29.823 r0 top
R54 "5.1k" 0402 39.263,-27.44 r90 top
R55 "22R" 0402 40.9,-23.2 r90 top
R56 "22R" 0402 42.8,-23.2 r90 top
R57 "5.1k" 0402 44.4,-27.44 r90 top
R58_CELL1 "100R" 0603 28.7,-34.05 r0 top (schematic designator R58)
R58_CELL2 "100R" 0603 28.7,-29.932 r0 top (schematic designator R58)
R58_CELL3 "100R" 0603 28.7,-25.815 r0 top (schematic designator R58)
R58_CELL4 "100R" 0603 28.7,-21.697 r0 top (schematic designator R58)
R58_CELL5 "100R" 0603 28.7,-17.579 r0 top (schematic designator R58)
R58_CELL6 "100R" 0603 28.7,-13.462 r0 top (schematic designator R58)
R58_CELL7 "100R" 0603 28.7,-9.344 r0 top (schematic designator R58)
R58_CELL8 "100R" 0603 28.7,-5.226 r0 top (schematic designator R58)
R58_CELL9 "100R" 0603 28.7,-1.109 r0 top (schematic designator R58)
R58_CELL10 "100R" 0603 28.7,3.009 r0 top (schematic designator R58)
R58_CELL11 "100R" 0603 28.7,7.126 r0 top (schematic designator R58)
R58_CELL12 "100R" 0603 28.7,11.244 r0 top (schematic designator R58)
R58_CELL13 "100R" 0603 28.7,15.362 r0 top (schematic designator R58)
R58_CELL14 "100R" 0603 28.7,19.479 r0 top (schematic designator R58)
R58_CELL15 "100R" 0603 28.7,23.597 r0 top (schematic designator R58)
R58_CELL16 "100R" 0603 28.7,27.715 r0 top (schematic designator R58)
R58_CELL17 "100R" 0603 28.7,31.832 r0 top (schematic designator R58)
R58_CELL18 "100R" 0603 28.7,35.95 r0 top (schematic designator R58)
R59_CELL1 "3.3K" 0603 28.7,-35.95 r0 top (schematic designator R59)
R59_CELL2 "3.3K" 0603 28.7,-31.832 r0 top (schematic designator R59)
R59_CELL3 "3.3K" 0603 28.7,-27.715 r0 top (schematic designator R59)
R59_CELL4 "3.3K" 0603 28.7,-23.597 r0 top (schematic designator R59)
R59_CELL5 "3.3K" 0603 28.7,-19.479 r0 top (schematic designator R59)
R59_CELL6 "3.3K" 0603 28.7,-15.362 r0 top (schematic designator R59)
R59_CELL7 "3.3K" 0603 28.7,-11.244 r0 top (schematic designator R59)
R59_CELL8 "3.3K" 0603 28.7,-7.126 r0 top (schematic designator R59)
R59_CELL9 "3.3K" 0603 28.7,-3.009 r0 top (schematic designator R59)
R59_CELL10 "3.3K" 0603 28.7,1.109 r0 top (schematic designator R59)
R59_CELL11 "3.3K" 0603 28.7,5.226 r0 top (schematic designator R59)
R59_CELL12 "3.3K" 0603 28.7,9.344 r0 top (schematic designator R59)
R59_CELL13 "3.3K" 0603 28.7,13.462 r0 top (schematic designator R59)
R59_CELL14 "3.3K" 0603 28.7,17.579 r0 top (schematic designator R59)
R59_CELL15 "3.3K" 0603 28.7,21.697 r0 top (schematic designator R59)
R59_CELL16 "3.3K" 0603 28.7,25.815 r0 top (schematic designator R59)
R59_CELL17 "3.3K" 0603 28.7,29.932 r0 top (schematic designator R59)
R59_CELL18 "3.3K" 0603 28.7,34.05 r0 top (schematic designator R59)
R60_CELL1 "33R" 2512 19.55,-35 r0 top (schematic designator R60)
R60_CELL2 "33R" 2512 19.55,-30.882 r0 top (schematic designator R60)
R60_CELL3 "33R" 2512 19.55,-26.765 r0 top (schematic designator R60)
R60_CELL4 "33R" 2512 19.55,-22.647 r0 top (schematic designator R60)
R60_CELL5 "33R" 2512 19.55,-18.529 r0 top (schematic designator R60)
R60_CELL6 "33R" 2512 19.55,-14.412 r0 top (schematic designator R60)
R60_CELL7 "33R" 2512 19.55,-10.294 r0 top (schematic designator R60)
R60_CELL8 "33R" 2512 19.55,-6.176 r0 top (schematic designator R60)
R60_CELL9 "33R" 2512 19.55,-2.059 r0 top (schematic designator R60)
R60_CELL10 "33R" 2512 19.55,2.059 r0 top (schematic designator R60)
R60_CELL11 "33R" 2512 19.55,6.176 r0 top (schematic designator R60)
R60_CELL12 "33R" 2512 19.55,10.294 r0 top (schematic designator R60)
R60_CELL13 "33R" 2512 19.55,14.412 r0 top (schematic designator R60)
R60_CELL14 "33R" 2512 19.55,18.529 r0 top (schematic designator R60)
R60_CELL15 "33R" 2512 19.55,22.647 r0 top (schematic designator R60)
R60_CELL16 "33R" 2512 19.55,26.765 r0 top (schematic designator R60)
R60_CELL17 "33R" 2512 19.55,30.882 r0 top (schematic designator R60)
R60_CELL18 "33R" 2512 19.55,35 r0 top (schematic designator R60)
R61 "5k" 0402 66.986,-5.773 r180 top
R62 "5k" 0402 64.671,-5.773 r0 top
TP1 "1.3TP" TP2-1.3MM 43.612,24.943 r90 top
U1 "LTC6813HLWE-1#3ZZPBF" QFP50P1200X1200X160-65N 44,0 r270 top locked
U2 "STM32L476RCT6" QFP50P1200X1200X160-64N 57.631,-15.923 r270 top locked
U3 "LM5164DDAR" SOIC127P600X170-9N 56.188,21.211 r180 top
U4 "XC6219B332MR" SOT-23-5 43.786,-16.455 r270 top
U5 "INA240A1PWR" TSSOP-8 61.158,11.223 r270 top
U6 "2.731kHz" BUZ-SMD_4P-L7.5-W7.5-BR 75.9,-32.8 r180 top
U7 "TJA1042T/1J" SOP-8 57.903,-31.57 r0 top
U8 "USBLC6-2SC6" SOT95P280X145-6N 41.8,-26.45 r90 top
U9 "HDC1080DMBR" SON100P300X300X80-7N-D 65.706,-3.327 r180 top
Y1 "ABS06-32.768KHZ-T" OSC-SMD_L2.0-W1.2 60.126,-7.773 r0 top

## Footprints (in the part's own frame and the unit in brackets; to place one, negate y for a bottom-side part, rotate by r counter-clockwise, add the part's x,y. Pads: shape width x height; smd on the part's side, far side on the other; paste and mask are expansions set on the pad)
0402 [mm]
  rrect52% 0.58x0.58 smd mask+0.05: 1(-0.46,0) 2(0.46,0)
  silkscreen extent -0.94,-0.5 0.94,0.5, body extent -0.5,-0.25 0.5,0.25, height 0.4
0603 [mil]
  rrect50% 31.7x34 smd: 1(-29.6,0) 2(29.6,0)
  silkscreen extent -54,-26 54,26, body extent -37,-18 37,18, height 18
0805 [mm]
  rrect50% 1.1x1.4 smd: 1(-0.875,0) 2(0.875,0)
  body extent -1.01,-0.64 1.01,0.64, height 0.6
2512 [mm]
  rrect30% 1.4x3.5 smd: 1(-3.15,0) 2(3.15,0)
  body extent -3.2,-1.6 3.2,1.6, height 0.6
BM02B-GHS-TBT_1 [mm]
  rrect50% 0.6x1.7 smd: 1(0.625,1.675) 2(-0.625,1.675)
  rrect50% 1x2.8 smd: 3(-2.475,-1.675) 4(2.475,-1.675)
  silkscreen extent -2.87,-2.98 2.88,2.83, body extent -2.88,-2.73 2.88,2.13, height 4.26
BUZ-SMD_4P-L7.5-W7.5-BR [mm]
  rrect50% 1.8x1.8 smd: 1(3.15,-3.15) 2(3.15,3.15) 3(-3.15,3.15) 4(-3.15,-3.15)
  silkscreen extent -3.81,-3.81 3.81,3.81, body extent -3.75,-3.75 3.75,3.75, height 2.51
C0402 [mm]
  rrect52% 0.58x0.58 smd mask+0.05: 1(-0.46,0) 2(0.46,0)
  silkscreen extent -1.04,-0.5 1.04,0.5, body extent -0.5,-0.25 0.5,0.25, height 0.55
C-0805 [mil]
  rrect50% 55.5x53.1 smd: 1(-39.4,0) 2(39.4,0)
  silkscreen extent -77,-36 77,36, body extent -40,-25 40,25, height 24
C-1206 [mil]
  rrect50% 58.5x68 smd: 1(-62.7,0) 2(62.6,0)
  silkscreen extent -101,-43 101,43, body extent -63,-32 63,32, height 18
CONN-TH_2P-P2.50_XH-2AW [mm]
  round 1.8 hole 1.199: 1(-1.251,0) 2(1.251,0)
  silkscreen extent -3.71,0.28 3.75,7.5, body extent -3.77,-0.3 3.77,7.4, height 5.7
CONN-TH_T44001 [mm]
  round 2.9 hole 1.9: 1(-2.5,-3.6) 1(-2.5,3.6) 1(2.5,-3.6) 1(2.5,3.6)
  silkscreen extent -4,-4 4,4, body extent -4,-4 4,4, height 6.74
DIOM5226X230N [mm]
  rrect50% 2.35x1.55 smd: 1(-2.15,0) 2(2.15,0)
  silkscreen extent -2.92,-1.3 2.6,1.3, body extent -2.6,-1.3 2.6,1.3, height 2.3
DIOM7959X262N [mm]
  rrect50% 2.2x3.15 smd: 1(-3.5,0) 2(3.5,0)
  silkscreen extent -4.6,-2.95 3.97,2.95, body extent -3.97,-2.95 3.97,2.95, height 2.31
L0603 [mil]
  rrect50% 31.7x34 smd: 1(-29.6,0) 2(29.6,0)
  silkscreen extent -54,-26 54,26, body extent -37,-18 37,18, height 18
L5040 [mm]
  rrect50% 1.55x4.5 smd: 1(-1.925,0) 2(1.925,0)
  silkscreen extent -2.5,-2.54 2.5,2.5, body extent -2.5,-2.52 2.5,2.48, height 4.01
LED0603 [mil] "LED0603"
  rrect50% 31.5x31.5 smd: 1(-31.5,0) 2(31.5,0)
  silkscreen extent -59,-30 55,30, body extent -31,-16 31,16, height 22
OSC-SMD_L2.0-W1.2 [mm]
  rrect50% 0.9x1.3 smd: 1(-0.85,0) 2(0.85,0)
  silkscreen extent -1.53,-0.88 1.53,0.88, body extent -1,-0.6 1,0.6, height 0.61
PZ-4P-2_54 [mm] "PZ-4P-2_54"
  rect 1.6x1.6 hole 1: 1(-3.81,0)
  round 1.6 hole 1: 2(-1.27,0) 3(1.27,0) 4(3.81,0)
  silkscreen extent -5.1,-1.3 5.1,1.3, body extent -5.08,-1.33 5.09,1.33, height 8.54
QFP50P1200X1200X160-64N [mm]
  rrect50% 1.475x0.3 smd: 1(-5.738,3.75) 2(-5.738,3.25) 3(-5.738,2.75) 4(-5.738,2.25) 5(-5.738,1.75) 6(-5.738,1.25) 7(-5.738,0.75) 8(-5.738,0.25) 9(-5.738,-0.25) 10(-5.738,-0.75) 11(-5.738,-1.25) 12(-5.738,-1.75) 13(-5.738,-2.25) 14(-5.738,-2.75) 15(-5.738,-3.25) 16(-5.738,-3.75) 33(5.738,-3.75) 34(5.738,-3.25) 35(5.738,-2.75) 36(5.738,-2.25) 37(5.738,-1.75) 38(5.738,-1.25) 39(5.738,-0.75) 40(5.738,-0.25) 41(5.738,0.25) 42(5.738,0.75) 43(5.738,1.25) 44(5.738,1.75) 45(5.738,2.25) 46(5.738,2.75) 47(5.738,3.25) 48(5.738,3.75)
  rrect50% 0.3x1.475 smd: 17(-3.75,-5.738) 18(-3.25,-5.738) 19(-2.75,-5.738) 20(-2.25,-5.738) 21(-1.75,-5.738) 22(-1.25,-5.738) 23(-0.75,-5.738) 24(-0.25,-5.738) 25(0.25,-5.738) 26(0.75,-5.738) 27(1.25,-5.738) 28(1.75,-5.738) 29(2.25,-5.738) 30(2.75,-5.738) 31(3.25,-5.738) 32(3.75,-5.738) 49(3.75,5.738) 50(3.25,5.738) 51(2.75,5.738) 52(2.25,5.738) 53(1.75,5.738) 54(1.25,5.738) 55(0.75,5.738) 56(0.25,5.738) 57(-0.25,5.738) 58(-0.75,5.738) 59(-1.25,5.738) 60(-1.75,5.738) 61(-2.25,5.738) 62(-2.75,5.738) 63(-3.25,5.738) 64(-3.75,5.738)
  silkscreen extent -6.35,-4.65 4.65,4.65, body extent -6,-6 6,6, height 1.31
QFP50P1200X1200X160-65N [mm]
  rrect50% 1.475x0.3 smd: 1(-5.738,3.75) 2(-5.738,3.25) 3(-5.738,2.75) 4(-5.738,2.25) 5(-5.738,1.75) 6(-5.738,1.25) 7(-5.738,0.75) 8(-5.738,0.25) 9(-5.738,-0.25) 10(-5.738,-0.75) 11(-5.738,-1.25) 12(-5.738,-1.75) 13(-5.738,-2.25) 14(-5.738,-2.75) 15(-5.738,-3.25) 16(-5.738,-3.75) 33(5.738,-3.75) 34(5.738,-3.25) 35(5.738,-2.75) 36(5.738,-2.25) 37(5.738,-1.75) 38(5.738,-1.25) 39(5.738,-0.75) 40(5.738,-0.25) 41(5.738,0.25) 42(5.738,0.75) 43(5.738,1.25) 44(5.738,1.75) 45(5.738,2.25) 46(5.738,2.75) 47(5.738,3.25) 48(5.738,3.75)
  rrect50% 0.3x1.475 smd: 17(-3.75,-5.738) 18(-3.25,-5.738) 19(-2.75,-5.738) 20(-2.25,-5.738) 21(-1.75,-5.738) 22(-1.25,-5.738) 23(-0.75,-5.738) 24(-0.25,-5.738) 25(0.25,-5.738) 26(0.75,-5.738) 27(1.25,-5.738) 28(1.75,-5.738) 29(2.25,-5.738) 30(2.75,-5.738) 31(3.25,-5.738) 32(3.75,-5.738) 49(3.75,5.738) 50(3.25,5.738) 51(2.75,5.738) 52(2.25,5.738) 53(1.75,5.738) 54(1.25,5.738) 55(0.75,5.738) 56(0.25,5.738) 57(-0.25,5.738) 58(-0.75,5.738) 59(-1.25,5.738) 60(-1.75,5.738) 61(-2.25,5.738) 62(-2.75,5.738) 63(-3.25,5.738) 64(-3.75,5.738)
  rrect10% 5.84x5.84 smd: 65(0,0)
  silkscreen extent -6.35,4.38 -6.1,4.63, body extent -6,-6 6,6, height 1.6
R1206 [mil]
  rrect50% 58.5x68 smd: 1(-62.7,0) 2(62.6,0)
  silkscreen extent -101,-43 101,43, body extent -60,-31 60,31, height 26
RES-SMD_L10.0-W5.2 [mm]
  rrect50% 3.3x5.5 smd: 0(-4.5,0) 1(4.5,0)
  silkscreen extent -6.48,-3 6.48,3, body extent -5,-2.55 5,2.55, height 1
S10B-PH-SM4-TB [mm]
  rrect50% 1x3.5 smd: 1(9,-2.775) 2(6.998,-2.773) 3(4.998,-2.773) 4(2.998,-2.773) 5(0.998,-2.773) 6(-1.002,-2.773) 7(-3.002,-2.773) 8(-5.002,-2.773) 9(-7.002,-2.773) 10(-9.002,-2.773)
  rrect50% 1.5x3.4 smd: 11(-11.4,2.775) 12(11.4,2.775)
  silkscreen extent -12.2,-4.02 12,4.8, body extent -12,-4.28 12,4.23, height 5.55
SM04B-GHS-TB [mm]
  rrect50% 0.6x1.7 smd: 1(-1.875,0.2) 2(-0.625,0.2) 3(0.625,0.2) 4(1.875,0.2)
  rrect50% 1x2.7 smd: 5(-3.725,-3) 6(3.725,-3)
  silkscreen extent -4.13,-4.25 4.13,0, body extent -4.12,-4.13 4.13,0.72, height 4.45
SOD123 [mm]
  rrect50% 0.85x0.85 smd: 1(-1.675,0) 2(1.675,0)
  silkscreen extent -1.43,-0.85 1.45,0.85, body extent -1.95,-0.9 1.95,0.9, height 1.18
SOD-123F [mm] "SOD-123F"
  rrect50% 1.001x1.1 smd: 1(-1.628,0) 2(1.628,0)
  silkscreen extent -1.6,-0.9 1.6,0.9, body extent -1.85,-0.9 1.85,0.9, height 1.19
SOD-323 [mm]
  rrect50% 0.65x0.85 smd: 1(-1.125,0) 2(1.125,0)
  silkscreen extent -0.5,-0.63 0.5,0.63, body extent -1.3,-0.67 1.3,0.67, height 1.1
SOIC127P600X170-9N [mm]
  rrect50% 1.525x0.65 smd: 1(-2.712,1.905) 2(-2.712,0.635) 3(-2.712,-0.635) 4(-2.712,-1.905) 5(2.712,-1.905) 6(2.712,-0.635) 7(2.712,0.635) 8(2.712,1.905)
  rrect20% 2.4x3.1 smd: 9(0,0)
  silkscreen extent -3.47,2.58 -1.95,2.58, body extent -3,-2.45 3,2.45, height 1.57
SON100P300X300X80-7N-D [mm]
  rrect50% 0.85x0.45 smd: 1(-1.45,1) 2(-1.45,0) 3(-1.45,-1) 4(1.45,-1) 5(1.45,0) 6(1.45,1)
  rrect25% 1.6x2.5 smd: 7(0,0)
  silkscreen extent -2.49,0.87 -2.24,1.12, body extent -1.55,-1.5 1.55,1.5, height 0.8
SOP50P490X110-11N [mm]
  rrect50% 1.425x0.3 smd: 1(-2.212,1) 2(-2.212,0.5) 3(-2.212,0) 4(-2.212,-0.5) 5(-2.212,-1) 6(2.212,-1) 7(2.212,-0.5) 8(2.212,0) 9(2.212,0.5) 10(2.212,1)
  rrect20% 1.68x1.88 smd: 11(0,0)
  silkscreen extent -2.93,1.5 -1.5,1.5, body extent -2.45,-1.5 2.45,1.5, height 1.1
SOP-8 [mil] "SOP-8"
  oval 22.4x76.81 smd: 1(-75,-106.5) 2(-25,-106.5) 3(25,-106.5) 4(75,-106.5) 5(75,106.5) 6(25,106.5) 7(-25,106.5) 8(-75,106.5)
  silkscreen extent -110,-111 98,79, body extent -96,-118 96,118, height 69
SOT95P280X145-6N [mm]
  rrect50% 1.2x0.55 smd: 1(-1.25,0.95) 2(-1.25,0) 3(-1.25,-0.95) 4(1.25,-0.95) 5(1.25,0) 6(1.25,0.95)
  silkscreen extent -1.85,-1.46 0.3,1.58, body extent -1.4,-1.46 1.4,1.46, height 1.45
SOT-23 [mm]
  rrect50% 0.9x0.95 smd: D(0,1) G(-0.95,-1) S(0.95,-1)
  silkscreen extent -1.5,-0.1 1.5,0.7, body extent -1.5,-1.32 1.5,1.32, height 1.08
SOT-23-5 [mm] "SOT-23-5"
  rrect50% 1.001x0.599 smd: 1(1.301,-0.95) 2(1.301,0) 3(1.301,0.95) 4(-1.301,0.95) 5(-1.301,-0.95)
  silkscreen extent -0.9,-1.7 1.4,1.5, body extent -1.4,-1.45 1.4,1.45, height 1.3
TOLL [mm] "TOLL"
  rrect5% 8.7x9.9 smd: D(2,0)
  rrect50% 2.463x0.8 smd: G(-5.459,4.191) S(-5.46,3.001) S(-5.459,-4.199) S(-5.459,-2.999) S(-5.459,-1.799) S(-5.459,-0.599) S(-5.459,0.601) S(-5.459,1.801)
  rrect50% 0.763x8 smd: S(-4.609,-0.599)
  silkscreen extent -6.1,-5 -2.55,5.46, body extent -6.04,-4.95 5.63,4.95, height 2.3
TP2-1.3MM [mm] "Test pin"
  round 1.3 smd paste-1 mask+0.051: 1(0,0)
  silkscreen extent -0.85,-0.85 0.85,0.85
TSSOP-8 [mm] "TSSOP-8"
  oval 0.353x1.453 smd: 1(-0.975,-2.926) 2(-0.325,-2.926) 3(0.325,-2.926) 4(0.975,-2.926) 5(0.975,2.926) 6(0.325,2.926) 7(-0.325,2.926) 8(-0.975,2.926)
  silkscreen extent -1.9,-3 1.5,2.2, body extent -1.5,-3.2 1.5,3.2, height 1.2
USB-C-SMD_TYPE-C-6PIN-2MD-073 [mm]
  rrect50% 0.55x1.1 smd paste-100 mask+0.05: 1(-3.2,2.375) 2(-2.4,2.375) 11(2.4,2.375) 12(3.2,2.375)
  rrect50% 0.3x1.1 smd paste-100 mask+0.05: 3(-1.75,2.375) 4(-1.25,2.375) 5(-0.75,2.375) 6(-0.25,2.375) 7(0.25,2.375) 8(0.75,2.375) 9(1.25,2.375) 10(1.75,2.375)
  oval 1.1x2 hole 0.6 slot 1.2 at 90 deg paste-2539.97 mask+0.05: 13(-4.325,-2.375) 13(-4.325,1.825) 14(4.325,-2.375) 14(4.325,1.825)
  round 0.65 hole 0.65 unplated: ""(-2.89,1.305) ""(2.89,1.305)
  silkscreen extent -4.5,-4.77 4.57,0.59, body extent -4.47,-4.99 4.47,2.59, height 3.26

## Part data
C1 C24: library part 1uF/1206/CER/100V, "Capacitor, 1uF, 100V, X7R", Capacitance Tolerance="± 10%", Capacitor Case Style=1206, Dielectric Characteristic=X7R, Temperature Range="-55°C to +125°C", Voltage Rating=100V, Brand=AVX, Brand Number=12061C105K4Z2A, Capacitance=1uF, Order Code Supplier=1833855, Price=0,52, Supplier=Farnell
C2 C3 C6 C7 C8 C9: library part 1uF/0402/CER/6.3V, "Capacitor, 1uF, 6.3V, X5R", Capacitance=1uF, Capacitance Tolerance="± 10%", Capacitor Case Style=0402, Dielectric Characteristic=X5R, Temperature Range="-55°C to +85°C", Voltage Rating=6V3, Brand=AVX, Brand Number=04026D105KAT2A, Order Code Supplier=1327658, Price=0,0874, Supplier=Farnell
C4 C5 C39 C43 C44: library part 1uF/0402/CER/6.3V, "Capacitor, 1uF, 6.3V, X5R", Capacitance Tolerance="± 10%", Capacitor Case Style=0402, Dielectric Characteristic=X5R, Temperature Range="-55°C to +85°C", Voltage Rating=6V3, Brand=AVX, Brand Number=04026D105KAT2A, Capacitance=1uF, Order Code Supplier=1327658, Price=0,0874, Supplier=Farnell
C10 C11: library part 18pF/0402/CER/50V, "Capacitor, 18pF, 50V, NP0", Capacitance=18pF, Capacitance Tolerance="± 5%", Capacitor Case Style=0402, Dielectric Characteristic=NP0, Temperature Range="-55°C to 125°C", Voltage Rating=50V, Brand=MURATA, Brand Number=GRM1555C1H180JA01D, Order Code Supplier=1828876, Price=0,0177, Supplier=Farnell
C12 C13 C14 C15 C17 C19 C31 C33 C36 C38 C40 C42 C46 C47: library part 100nF/0402/CER/25V, "Capacitor, 100nF, 25V, X7R", Capacitance Tolerance=10nF, Capacitor Case Style=0402, Dielectric Characteristic=X7R, Temperature Range="-55 to +125 C", Voltage Rating=25V, Brand=MULTICOMP, Brand Number=GRM155R71E104KE14D, Capacitance=100nF, Order Code Supplier=2456106, Price=0,0225, Supplier=Farnell
C16 C18 C20 C30 C32 C41: library part 100nF/0402/CER/25V, "Capacitor, 100nF, 25V, X7R", Capacitance=100nF, Capacitance Tolerance=10nF, Capacitor Case Style=0402, Dielectric Characteristic=X7R, Temperature Range="-55 to +125 C", Voltage Rating=25V, Brand=MULTICOMP, Brand Number=GRM155R71E104KE14D, Order Code Supplier=2456106, Price=0,0225, Supplier=Farnell
C21 C25: library part 100nF/0402/CER/25V, "Capacitor, 100nF, 25V, X7R", Capacitance=100nF, Capacitance Tolerance=10nF, Capacitor Case Style=0402, Dielectric Characteristic=X7R, Temperature Range="-55 to +125 C", Voltage Rating=50V, Brand=MULTICOMP, Brand Number=GRM155R71E104KE14D, Order Code Supplier=2456106, Price=0,0225, Supplier=Farnell
C22: library part 100nF/0402/CER/25V, "Capacitor, 100nF, 25V, X7R", Capacitance=100nF, Capacitance Tolerance=10nF, Capacitor Case Style=0402, Dielectric Characteristic=X7R, Temperature Range="-55 to +125 C", Voltage Rating=16V, Brand=MULTICOMP, Brand Number=GRM155R71E104KE14D, Order Code Supplier=2456106, Price=0,0225, Supplier=Farnell
C23 C34 C35: library part 1uF/1206/CER/100V, "Capacitor, 1uF, 100V, X7R", Capacitance=1uF, Capacitance Tolerance="± 10%", Capacitor Case Style=1206, Dielectric Characteristic=X7R, Temperature Range="-55°C to +125°C", Voltage Rating=100V, Brand=AVX, Brand Number=12061C105K4Z2A, Order Code Supplier=1833855, Price=0,52, Supplier=Farnell
C26: library part 10uF/0805/CER/10V, "Capacitor, 10uF, 10V, X7R", Capacitance=10uF, Capacitance Tolerance="± 10%", Capacitor Case Style=0805, Dielectric Characteristic=X7R, Temperature Range="-55°C to +125°C", Voltage Rating=10V, Brand=MURATA, Brand Number=GRM21BR71A106KE51L, Order Code Supplier=1828828, Price=0,36, Supplier=Farnell
C27 C28: library part 10uF/0805/CER/10V, "Capacitor, 10uF, 10V, X7R", Capacitance Tolerance="± 10%", Capacitor Case Style=0805, Dielectric Characteristic=X7R, Temperature Range="-55°C to +125°C", Voltage Rating=10V, Brand=MURATA, Brand Number=GRM21BR71A106KE51L, Capacitance=10uF, Order Code Supplier=1828828, Price=0,36, Supplier=Farnell
C29: library part 2.2uF/0805/CER/50V, "Capacitor, 2.2uF, 50V,  X7R", Capacitance Tolerance="± 10%", Capacitor Case Style=0805, Dielectric Characteristic=X5R, Temperature Range="-55°C to +125°C", Voltage Rating=50V, Brand=MURATA, Brand Number=GRM219R61H225KE15D, Capacitance=2.2uF, Order Code Supplier=2611933, Price=0,113, Supplier=Farnell
C37: library part 100nF/0402/CER/25V, "Capacitor, 100nF, 25V, X7R", Capacitance=100nF, Capacitor Case Style=0402, Dielectric Characteristic=X7R, Temperature Range="-55 to +125 C", Voltage Rating=25V, Brand=MULTICOMP, Brand Number=GRM155R71E104KE14D, Capacitance Tolerance=10nF, Order Code Supplier=2456106, Price=0,0225, Supplier=Farnell
C45_CELL1 C45_CELL2 C45_CELL3 C45_CELL4 C45_CELL5 C45_CELL6 C45_CELL7 C45_CELL8 C45_CELL9 C45_CELL10 C45_CELL11 C45_CELL12 C45_CELL13 C45_CELL14 C45_CELL15 C45_CELL16 C45_CELL17 C45_CELL18: library part 100nF/0805/CER/100V, "Capacitor, 100nF, 100V, X7R", Capacitance Tolerance="± 10%", Capacitor Case Style=0805, Dielectric Characteristic=X7R, Temperature Range="-55°C to +125°C", Voltage Rating=100V, Brand=KEMET, Brand Number=C0805C104K1RACTU, Capacitance=100nF, Order Code Supplier=1650862, Price=0,096, Supplier=Farnell
D1: "TVS Diode (Uni-directional)", Arrow Part Number=SMAJ7.0A, Manufacturer_Name=LITTELFUSE, Mouser Part Number=576-SMAJ7.0A, Arrow Price/Stock=https://www.arrow.com/en/products/smaj7.0a/littelfuse?region=europe, Datasheet Link=https://www.littelfuse.com/media?resourcetype=datasheets&itemid=75e32973-b177-4ee3-a0ff-cedaf1abdb93&filename=smaj-datasheet, Height=2.29mm, Manufacturer_Part_Number=SMAJ7.0A, Mouser Price/Stock=https://www.mouser.co.uk/ProductDetail/Littelfuse/SMAJ7.0A?qs=zHiv0nsVGmqwPZkMuKJUUw%3D%3D
D2 D6: "Diode Zener, Vz: 16V, If: 0.1A, Vf: 0.9V", Case Style=SOD-123, Forward Current=0.1A, Forward Voltage=0.9V, Temperature Range="-65°C to +150°C", Zener Voltage=16V, Brand=Diodes, Brand Number=BZT52C16, Order Code Supplier=1902431, Price=0,087, Supplier=Farnell
D3 D4 D5 D12: library part MMSD4148T1G, "Diode, Vrrm: 100V, If: 0.15A, Vf: 1V", Case Style=SOD-123, Forward Current=0.2A, Forward Voltage=1V, Temperature Range="-65°C to +150°C", Brand="ON SEMICONDUCTOR", Brand Number=MMSD4148T1G, Order Code Supplier=9556079, Price=0,19, Supplier=Farnell, Vrrm=100V
D7 D8: "Diode TVS, Vrwm: 75V, Vbr: 81.9V, Vc: 113V, Ippm: 27A", Breakdown Voltage=81.9V, Case Style=SMB, Clamping Voltage=113V, Temperature Range="-55°C to +150°C", Brand=STMICROELECTRONICS, Brand Number=SMBJ70A-TR, Ippm=27A, Order Code Supplier=9886389, Price=0,33, Supplier=Farnell, Vrwm=70V
D9: "Diode", Manufacturer_Name="Diodes Incorporated", Mouser Part Number=621-ES2BA-F, Arrow Part Number=ES2BA-13-F, Arrow Price/Stock=https://www.arrow.com/en/products/es2ba-13-f/diodes-incorporated?region=nac, Datasheet Link=https://www.diodes.com/assets/Datasheets/ds14002.pdf, Height=2.3mm, Manufacturer_Part_Number=ES2BA-13-F, Mouser Price/Stock=https://www.mouser.co.uk/ProductDetail/Diodes-Incorporated/ES2BA-13-F?qs=VEnr2Ndo2sLuOIbJ1qj2iA%3D%3D
D10 D11: library part KP-2012SGC, "Led, Green, Li:12mcd, Vf:2.2V, If:0.02A", Case Style=0805, Forward Current=0.02A, Forward Voltage=2.2V, Temperature Range="-30°C to +85°C", Brand=KingBright, Brand Number=KP-2012SGC, Luminous Intensity=12mcd, Order Code Supplier=1318243, Price=0,06, Supplier=Farnell
D13_CELL1 D13_CELL2 D13_CELL3 D13_CELL4 D13_CELL5 D13_CELL6 D13_CELL7 D13_CELL8 D13_CELL9 D13_CELL10 D13_CELL11 D13_CELL12 D13_CELL13 D13_CELL14 D13_CELL15 D13_CELL16 D13_CELL17 D13_CELL18: "Diode, Vrrm: 7.5V, If: 0.2A, Vf: 0.9V", Case Style=SOD-323, Forward Current=0.2A, Forward Voltage=0.9V, Temperature Range="-65°C to +150°C", Zener Voltage=7.5V, Brand=NXP, Brand Number=PDZ7.5B,115, Order Code Supplier=2319197, Price=0,263, Supplier=Farnell
IC1: "Integrated Circuit", Manufacturer_Name="Analog Devices", Mouser Part Number=584-LTC7001EMSEPBF, Arrow Part Number=LTC7001EMSE#PBF, Arrow Price/Stock=https://www.arrow.com/en/products/ltc7001emsepbf/analog-devices?utm_currency=USD&region=nac, Datasheet Link=https://www.mouser.de/datasheet/2/609/LTC7001-1504282.pdf, Height=1.1mm, Manufacturer_Part_Number=LTC7001EMSE#PBF, Mouser Price/Stock=https://www.mouser.co.uk/ProductDetail/Analog-Devices/LTC7001EMSEPBF?qs=BZBei1rCqCDffAMQwGwGFw%3D%3D
J1 J2 J3 J4: library part T44001, "Bush with Circumference M4", Case Style=M5Bush, Brand=Wurth, Brand Number=7460408, Order Code Supplier=1821279, Price=4,17, Supplier=Farnell
J6 J7 J9: Current Rating (Max)=3A, Manufacturer=HANBO(汉博), Operating Temperature Range=-25℃~+85℃, Add into BOM=yes, Convert to PCB=yes, Datasheet=https://atta.szlcsc.com/upload/public/pdf/source/20230718/3B4FABA5D38EFB02DAF74E7C2B33D98F.pdf, Device=WAFER-XH254Z-2A, LCSC Part Name=WAFER-XH254Z-2A, Manufacturer Part=WAFER-XH254Z-2A, Mounting Style=直插, Number of Pins=2P, Number of PINs Per Row=2, Number of Rows=1, Pins Structure=1x2P, Pitch=2.54mm, Reference Series=XH, Supplier=LCSC, Supplier Footprint=插件,P=2.5mm, Supplier Part=C7432682, Symbol=WAFER-XH254Z-2A
J10 J12: "Connector", Arrow Part Number=S10B-PH-SM4-TB(LF)(SN), Manufacturer_Name="JST (JAPAN SOLDERLESS TERMINALS)", Mouser Part Number=306-S10BPHSM4TBLFSN, Arrow Price/Stock=https://www.arrow.com/en/products/s10b-ph-sm4-tb-lf-sn/jst-manufacturing?region=nac, Datasheet Link=http://uk.rs-online.com/web/p/products/6881350, Manufacturer_Part_Number=S10B-PH-SM4-TB(LF)(SN), Mouser Price/Stock=https://www.mouser.co.uk/ProductDetail/JST-Commercial/S10B-PH-SM4-TBLFSN?qs=QpmGXVUTftH7ZRPAPdrNVw%3D%3D
J14: Core Colour=黑色, Current Rating - Power (Max)=5A, LCSC Part Name="Type-C 母 卧贴", Manufacturer="SHOU HAN(首韩)", Operating Temperature Range=-25℃~+85℃, Rated Voltage (Max)=5V, Add into BOM=yes, Connect-Disconnect Life=5千次, Connector Type=Type-C, Convert to PCB=yes, Datasheet=https://atta.szlcsc.com/upload/public/pdf/source/20211123/39B17C16241EAC15C5E277BDA434118E.pdf, Device="TYPE-C 16PIN 2MD(073)", Gender=母, Manufacturer Part="TYPE-C 16PIN 2MD(073)", Mounting Style=卧贴, Number of Contacts=16P, Number of Ports=1, Standard="USB 3.1", Supplier=LCSC, Supplier Footprint=SMD, Supplier Part=C2765186, Symbol="TYPE-C 16PIN 2MD(073)"
L1: library part 74404054221, "Inductor", Manufacturer_Name="Wurth Elektronik", Mouser Part Number=710-74404054221, Datasheet Link=https://www.mouser.com/datasheet/2/445/74404054221-1280555.pdf, Height=4mm, Manufacturer_Part_Number=74404054221, Mouser Price/Stock=https://www.mouser.co.uk/ProductDetail/Wurth-Elektronik/74404054221?qs=f9yNj16SXrLBSuRgk86STQ%3D%3D
L2: "Inductor", Arrow Part Number=LQG15HS4N7C02D, Manufacturer_Name="Murata Electronics", Mouser Part Number=81-LQG15HS4N7C02D, Arrow Price/Stock=https://www.arrow.com/en/products/lqg15hs4n7c02d/murata-manufacturing, Datasheet Link=https://search.murata.co.jp/Ceramy/image/img/P02/JELF243B-0010.pdf, Height=0.6mm, Manufacturer_Part_Number=LQG15HS4N7C02D, Mouser Price/Stock=https://www.mouser.co.uk/ProductDetail/Murata-Electronics/LQG15HS4N7C02D?qs=60uY6ySkanQsgm4t8ngjFA%3D%3D
Q1 Q2 Q3 Q10: "Mosfet, N-channel, Vds:100V, Id:0.15A, Vgs-th:2.8V, Rds-on:3.5ohm", Case Style=SOT-23, Drain Current=0.15A, Drain Source Voltage=100V, Gate Source Voltage=20V, On Resistance=3.5ohm, Temperature Range="-55°C to +150°C", Threshold Voltage=2.8V, Brand=NXP, Brand Number=BSS123, Order Code Supplier=1510764, Price=0,082, Supplier=Farnell, Transistor Polarity=N-channel
Q4 Q5 Q6 Q7: "Mosfet, N-channel, Vds:100V, Id:330A, Vgs-th:3.7V, Rds-on:0.00115ohm", Case Style=TO-263, Drain Current=338A, Drain Source Voltage=60V, Gate Source Voltage=10V, On Resistance=0.00115ohm, Temperature Range="-55°C to +175°C", Threshold Voltage=3.7V, Brand="INTERNATIONAL RECTIFIER", Brand Number=IRFS7530-7PPBF, Order Code Supplier=2580027, Price=4,40, Supplier=Farnell, Transistor Polarity=N-Channel
Q8 Q9 Q11_CELL1 Q11_CELL2 Q11_CELL3 Q11_CELL4 Q11_CELL5 Q11_CELL6 Q11_CELL7 Q11_CELL8 Q11_CELL9 Q11_CELL10 Q11_CELL11 Q11_CELL12 Q11_CELL13 Q11_CELL14 Q11_CELL15 Q11_CELL16 Q11_CELL17 Q11_CELL18: "Mosfet, P-channel, Vds:20V, Id:4.7A, Vgs-th:1V, Rds-on:0.039ohm", Case Style=SOT-23, Drain Current=4.7A, Drain Source Voltage=20V, Gate Source Voltage=8V, On Resistance=0.039ohm, Temperature Range="-55°C to +150°C", Threshold Voltage=1V, Brand="Taiwan Semiconductor", Brand Number=TSM2323CX, Order Code Supplier=1864590, Price=0,195, Supplier=Farnell, Transistor Polarity=P-channel
R1 R20: library part RQ73C2B10RBTDF, "Resistor", Manufacturer_Name="TE Connectivity", Datasheet Link=https://www.te.com/commerce/DocumentDelivery/DDEController?Action=showdoc&DocId=Data+Sheet%7F1773270-2%7FB%7Fpdf%7FEnglish%7FENG_DS_1773270-2_B.pdf%7F2176383-1, Height=0.65mm, Manufacturer_Part_Number=RQ73C2B10RBTDF
R2 R5 R6 R21 R22 R23 R24 R25 R26: library part 1M/0402/0063W/50V, "Resistor, 1M, 0.1%, 0.0625W, 50V, 100PPM, 0402", Case Style=0402, Power Rating=0.063W, Resistance=1M, Temperature Coefficient="± 100PPM", Temperature Range="-55°C to +125°C", Voltage Rating=50V, Brand="VISHAY DRALORIC", Brand Number=CRCW04021M00FKED, Order Code Supplier=2121984, Price=0,0006, Supplier=Farnell
R3 R7: library part 0/0603/0063W/50V, "Resistor, 0R, 0.1%, 0.063W, 50V, 200PPM, 0603", Case Style=0603, Power Rating=0.063W, Temperature Coefficient="± 200PPM", Temperature Range="-55°C to +125°C", Voltage Rating=50V, Brand="VISHAY DRALORIC", Brand Number=CRCW06030000Z0EA, Order Code Supplier=2122112, Price=0,043, Resistance=0R, Supplier=Farnell
R4 R30: library part 1M/0402/0063W/50V, "Resistor, 1M, 0.1%, 0.0625W, 50V, 100PPM, 0402", Case Style=0402, Power Rating=0.063W, Temperature Coefficient="± 100PPM", Temperature Range="-55°C to +125°C", Voltage Rating=50V, Brand="VISHAY DRALORIC", Brand Number=CRCW04021M00FKED, Order Code Supplier=2121984, Price=0,0006, Resistance=1M, Supplier=Farnell
R8 R10 R12 R14 R18 R27 R29 R31: library part 10k/0402/0063W/50V, "Resistor, 10k, 0.1%, 0.0625W, 50V, 100PPM, 0402", Case Style=0402, Power Rating=0.063W, Temperature Coefficient="± 100PPM", Temperature Range="-55°C to +125°C", Voltage Rating=50V, Brand="VISHAY DRALORIC", Brand Number=CRCW040210K0FKED, Order Code Supplier=2121730, Price=0,0005, Resistance=10k, Supplier=Farnell
R9 R11 R13 R15 R17 R61 R62: library part 10k/0402/0063W/50V, "Resistor, 10k, 0.1%, 0.0625W, 50V, 100PPM, 0402", Case Style=0402, Power Rating=0.063W, Resistance=10k, Temperature Coefficient="± 100PPM", Temperature Range="-55°C to +125°C", Voltage Rating=50V, Brand="VISHAY DRALORIC", Brand Number=CRCW040210K0FKED, Order Code Supplier=2121730, Price=0,0005, Supplier=Farnell
R16: "THERMISTOR, NTC, 100K, 5%", Case Style=0805, Brand=VISHAY, Brand Number=NTCS0805E4104JMT, Order Code Supplier=1187095, Price=0,65, Supplier=Farnell
R19: library part 1/0805/0250W/150V, "Resistor, 1R, 1%, 0.25W, 150V, 200PPM, 0805", Case Style=0805, Power Rating=0.25W, Temperature Coefficient="± 200PPM", Temperature Range="-55°C to +125°C", Voltage Rating=150V, Brand=PANASONIC, Brand Number=ERJ6BQF1R0V, Order Code Supplier=1717826, Price=0,28, Resistance=1R, Supplier=Farnell
R28 R58_CELL1 R58_CELL2 R58_CELL3 R58_CELL4 R58_CELL5 R58_CELL6 R58_CELL7 R58_CELL8 R58_CELL9 R58_CELL10 R58_CELL11 R58_CELL12 R58_CELL13 R58_CELL14 R58_CELL15 R58_CELL16 R58_CELL17 R58_CELL18: library part 100/0603/0063W/50V, "Resistor, 100R, 1%, 0.063W, 50V, 200PPM, 0603", Case Style=0603, Power Rating=0.063W, Temperature Coefficient="± 200PPM", Temperature Range="-55°C to +125°C", Voltage Rating=50V, Brand="VISHAY DRALORIC", Brand Number=CRCW0603100RFKEA, Order Code Supplier=2122239, Price=0,007, Resistance=100R, Supplier=Farnell
R32 R33: library part FCSL110R001JER, "1mohm, 5 W, ± 5%, 4320 Wide", Brand=Ohmite, Brand Number=FCSL110R001JER, Order Code Supplier=2420535, Price=3,81, Supplier=Farnell
R34 R35 R37 R38 R39: library part 100/0603/0063W/50V, "Resistor, 100R, 1%, 0.063W, 50V, 200PPM, 0603", Case Style=0603, Power Rating=0.063W, Resistance=100R, Temperature Coefficient="± 200PPM", Temperature Range="-55°C to +125°C", Voltage Rating=50V, Brand="VISHAY DRALORIC", Brand Number=CRCW0603100RFKEA, Order Code Supplier=2122239, Price=0,007, Supplier=Farnell
R36 R40 R41 R43 R44 R48: library part 1.5k/0402/0063W/50V, "Resistor, 1.5k, 0.1%, 0.0625W, 50V, 100PPM, 0402", Case Style=0402, Power Rating=0.063W, Resistance=1.5k, Temperature Coefficient="± 100PPM", Temperature Range="-55°C to +125°C", Voltage Rating=50V, Brand="VISHAY DRALORIC", Brand Number=CRCW04021K50FKED, Order Code Supplier=2121624, Price=0,0054, Supplier=Farnell
R42 R46 R47 R49 R52: library part 1.5k/0402/0063W/50V, "Resistor, 1.5k, 0.1%, 0.0625W, 50V, 100PPM, 0402", Case Style=0402, Power Rating=0.063W, Temperature Coefficient="± 100PPM", Temperature Range="-55°C to +125°C", Voltage Rating=50V, Brand="VISHAY DRALORIC", Brand Number=CRCW04021K50FKED, Order Code Supplier=2121624, Price=0,0054, Resistance=1.5k, Supplier=Farnell
R45 R50 R51: library part 470/0402/0063W/50V, "Resistor, 470, 1%, 0.0625W, 50V, 100PPM, 0402", Case Style=0402, Power Rating=0.063W, Temperature Coefficient="± 100PPM", Temperature Range="-55°C to +125°C", Voltage Rating=50V, Brand="VISHAY DRALORIC", Brand Number=CRG0402F470R, Order Code Supplier=2331533, Price=0,0099, Resistance=470, Supplier=Farnell
R53: library part 0/0805/0100W/150V_1, "Resistor, 0R, 0.1%, 0.1W, 150V, 200PPM, 0805", Case Style=0805, Power Rating=0.1W, Resistance=0R, Temperature Coefficient="± 200PPM", Temperature Range="-55°C to +125°C", Voltage Rating=150V, Brand=MULTICOMP, Brand Number="MC 0.1W 0805 0R", Order Code Supplier=9333681, Price=0,038, Supplier=Farnell
R54 R55 R56 R57: library part 240/0402/0063W/50V, "Resistor, 240, 0.1%, 0.0625W, 50V, 100PPM, 0402", Case Style=0402, Power Rating=0.063W, Resistance=240, Temperature Coefficient="± 100PPM", Temperature Range="-55°C to +125°C", Voltage Rating=50V, Brand="VISHAY DRALORIC", Brand Number=CRCW0402240RFKED, Order Code Supplier=2121522, Price=0,0006, Supplier=Farnell
R59_CELL1 R59_CELL2 R59_CELL3 R59_CELL4 R59_CELL5 R59_CELL6 R59_CELL7 R59_CELL8 R59_CELL9 R59_CELL10 R59_CELL11 R59_CELL12 R59_CELL13 R59_CELL14 R59_CELL15 R59_CELL16 R59_CELL17 R59_CELL18: library part 3.3K/0603/0125W/50V, "Resistor, 3.3K, 1%, 0.125W, 50V, 100PPM, 0603", Case Style=0603, Power Rating=0.125W, Temperature Coefficient="± 100PPM", Temperature Range="-55°C to +155°C", Voltage Rating=50V, Brand=MULTICOMP, Brand Number=MCHP03W8F3301T5E, Order Code Supplier=1576291, Price=0,08, Resistance=3.3K, Supplier=Farnell
R60_CELL1 R60_CELL2 R60_CELL3 R60_CELL4 R60_CELL5 R60_CELL6 R60_CELL7 R60_CELL8 R60_CELL9 R60_CELL10 R60_CELL11 R60_CELL12 R60_CELL13 R60_CELL14 R60_CELL15 R60_CELL16 R60_CELL17 R60_CELL18: library part 15/2512/2W/250V, "Resistor, 15R, 1%, 2W, 200V, 200PPM, 2512", Case Style=2512, Power Rating=2W, Resistance=15R, Temperature Coefficient="± 200PPM", Temperature Range="-55°C to +125°C", Voltage Rating=250V, Brand="TE CONNECTIVITY / CGS", Brand Number=352115RFT, Order Code Supplier=2117454, Price=0,30, Supplier=Farnell
TP1: library part TESTPT4, "1.3mm"
U1: "Integrated Circuit", Manufacturer_Name="Analog Devices", Mouser Part Number=584-6813HLWE13ZZPBF, Arrow Part Number=LTC6813HLWE-1#3ZZPBF, Arrow Price/Stock=https://www.arrow.com/en/products/ltc6813hlwe-13zzpbf/linear-technology, Datasheet Link=https://www.analog.com/media/en/technical-documentation/data-sheets/LTC6813-1.pdf, Height=1.6mm, Manufacturer_Part_Number=LTC6813HLWE-1#3ZZPBF, Mouser Price/Stock=https://www.mouser.co.uk/ProductDetail/Analog-Devices-Linear-Technology/LTC6813HLWE-13ZZPBF?qs=lYGu3FyN48e3Qu9IYnRGuQ%3D%3D
U2: "Integrated Circuit", Manufacturer_Name=STMicroelectronics, Mouser Part Number=511-STM32L476RCT6, Arrow Part Number=STM32L476RCT6, Arrow Price/Stock=https://www.arrow.com/en/products/stm32l476rct6/stmicroelectronics?region=nac, Datasheet Link=https://www.st.com/resource/en/datasheet/stm32l476rc.pdf, Height=1.6mm, Manufacturer_Part_Number=STM32L476RCT6, Mouser Price/Stock=https://www.mouser.co.uk/ProductDetail/STMicroelectronics/STM32L476RCT6?qs=kWQV1gtkNnc7gr%2FH8RnQ7w%3D%3D